# Altium PCB PPO.PcbDoc (part 1 of 2)
Units mil, origin at the board's own origin, x right, y up, seen from the top; angles counter-clockwise.
Board outline 2000 x 2000 mil, 4 copper layers (Top Layer, Int1, Int2, Bottom Layer), stack 53.912 mil thick; 86 components, 66 nets, 314 pads, 193 vias.
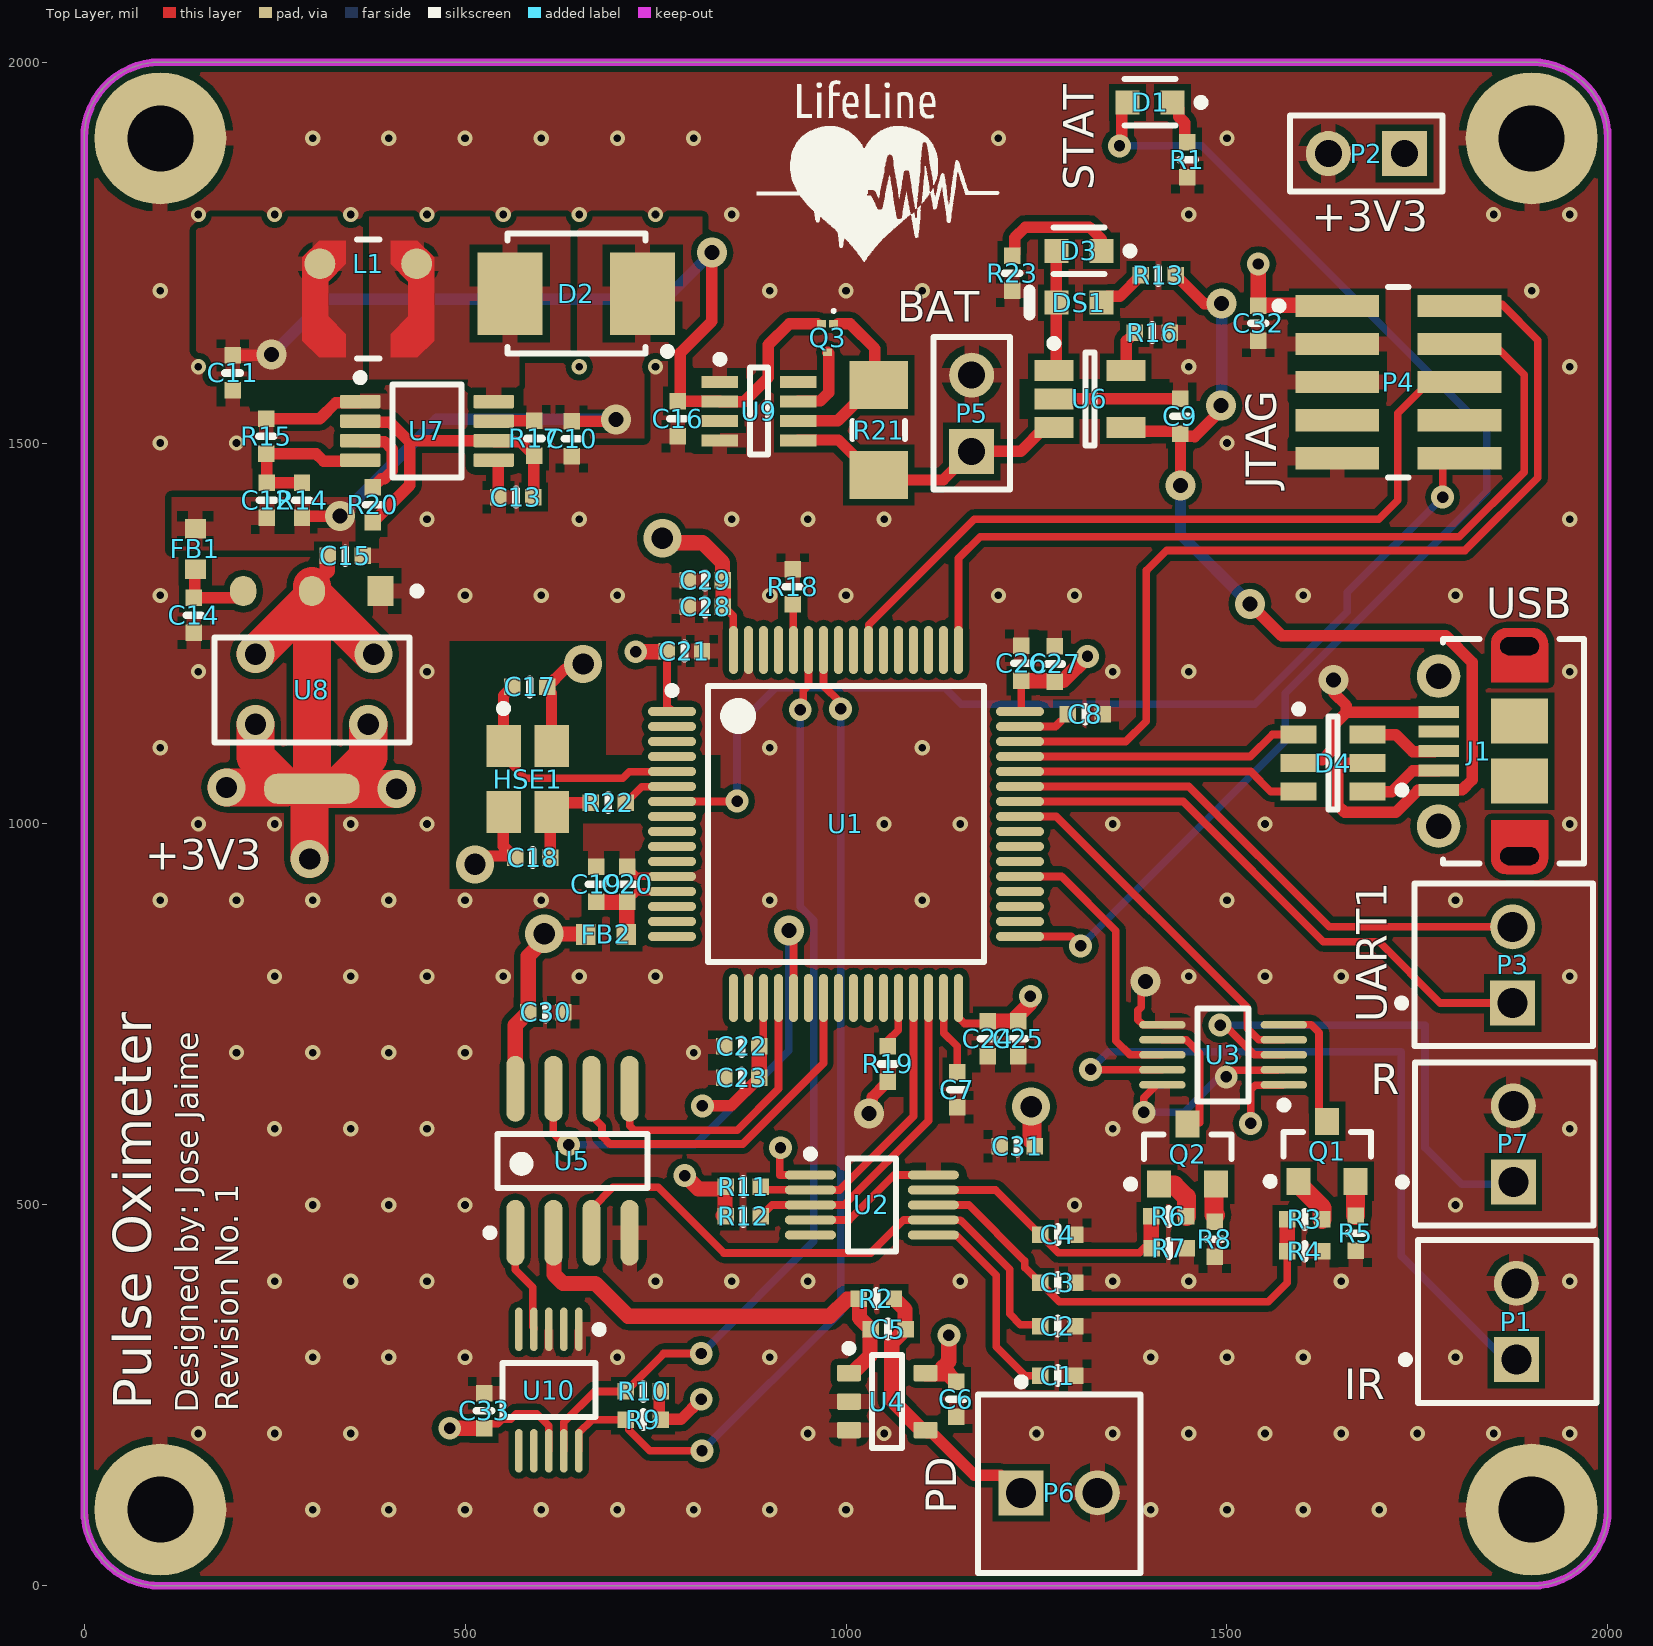
[diagram p0: Top Layer view]
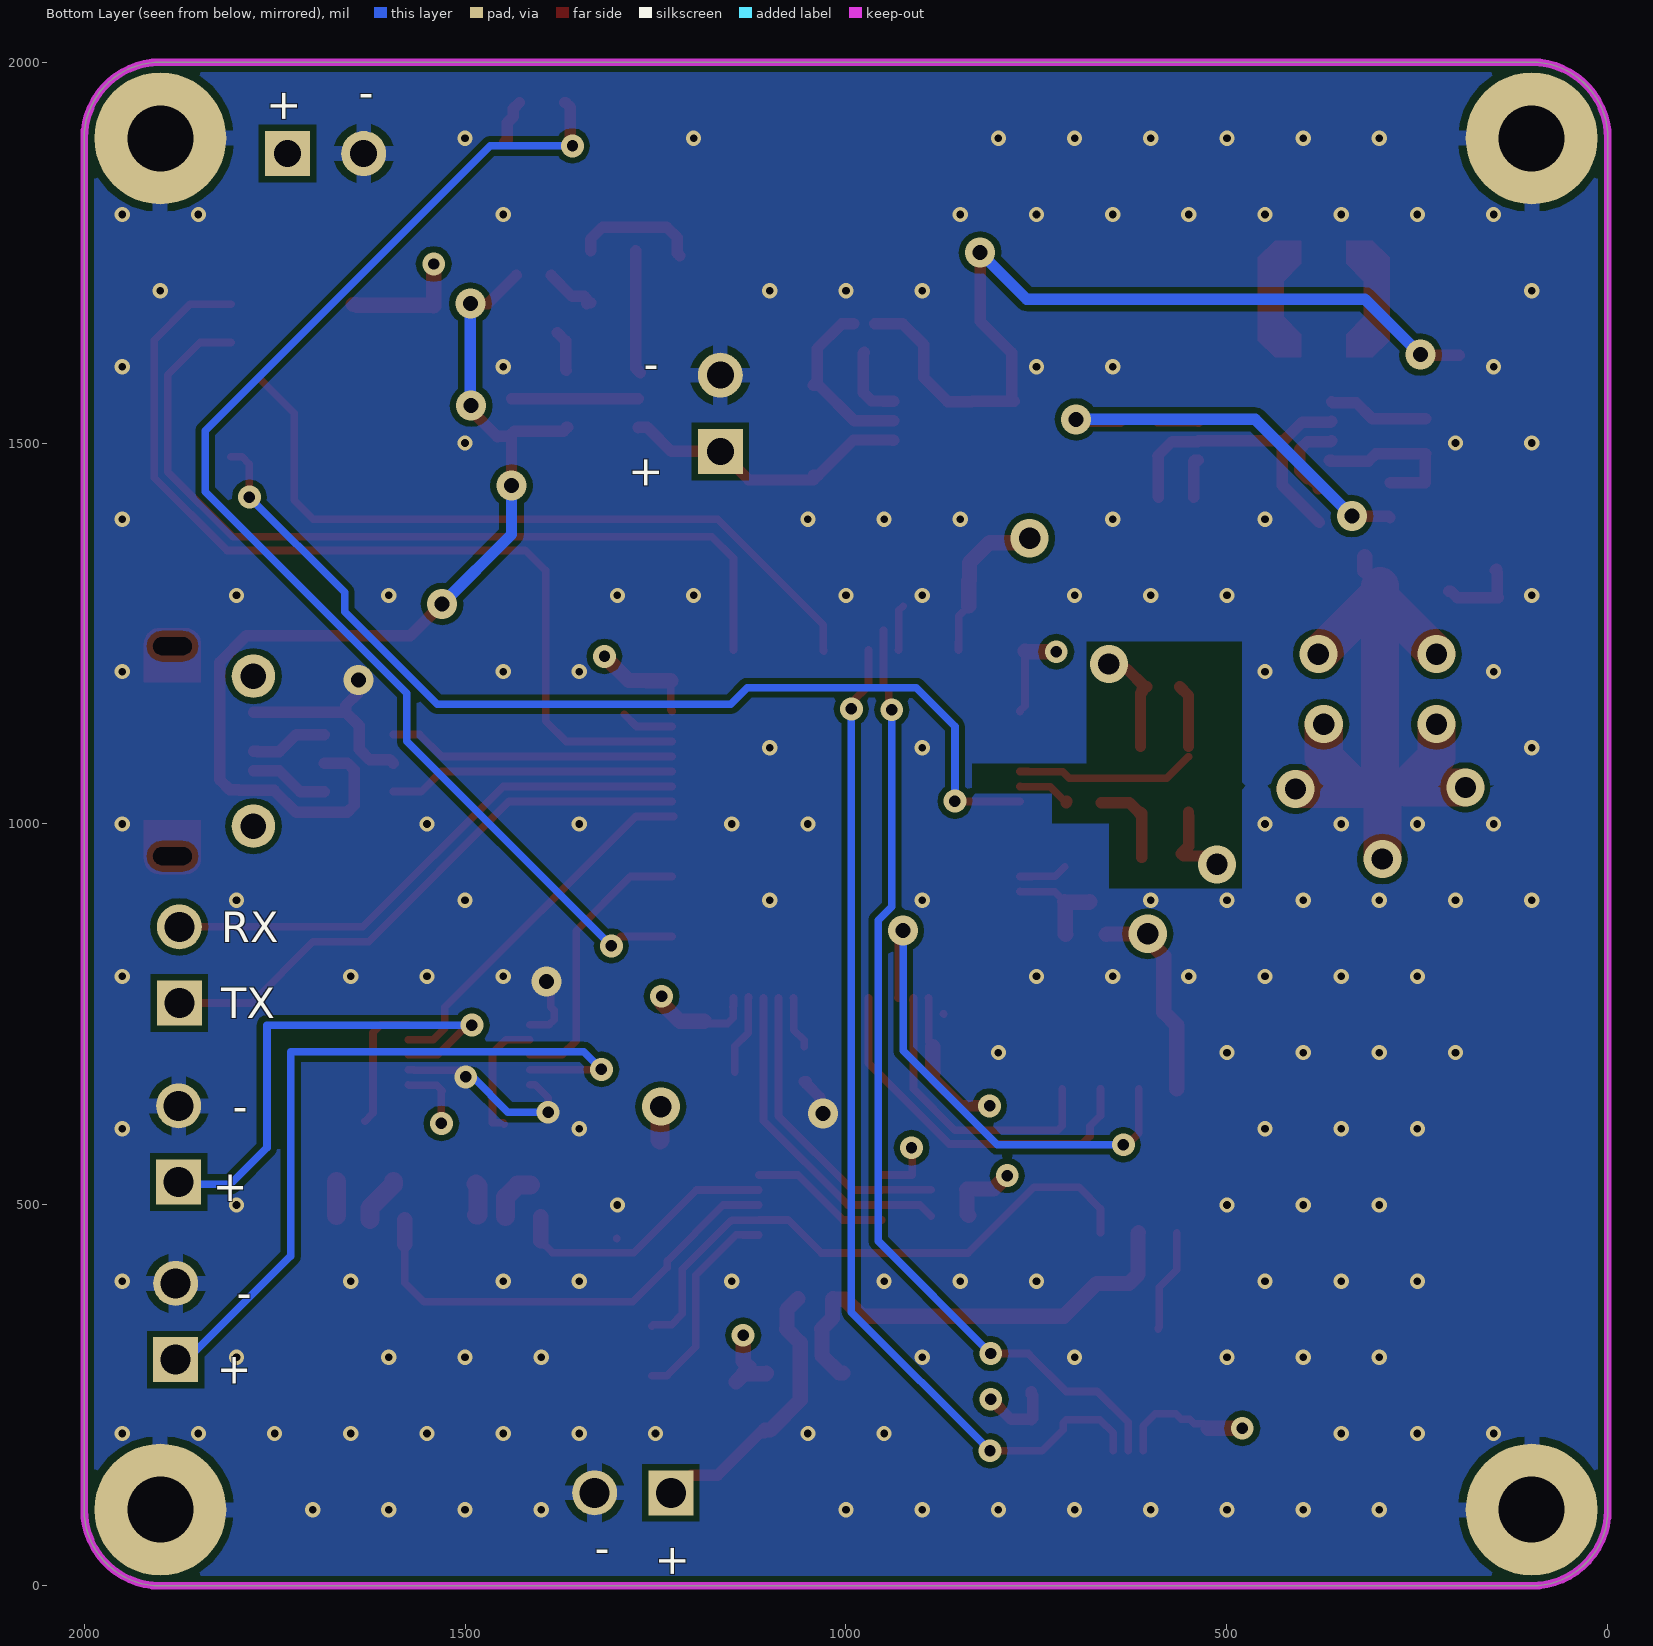
[diagram p1: Bottom Layer view, seen from below]
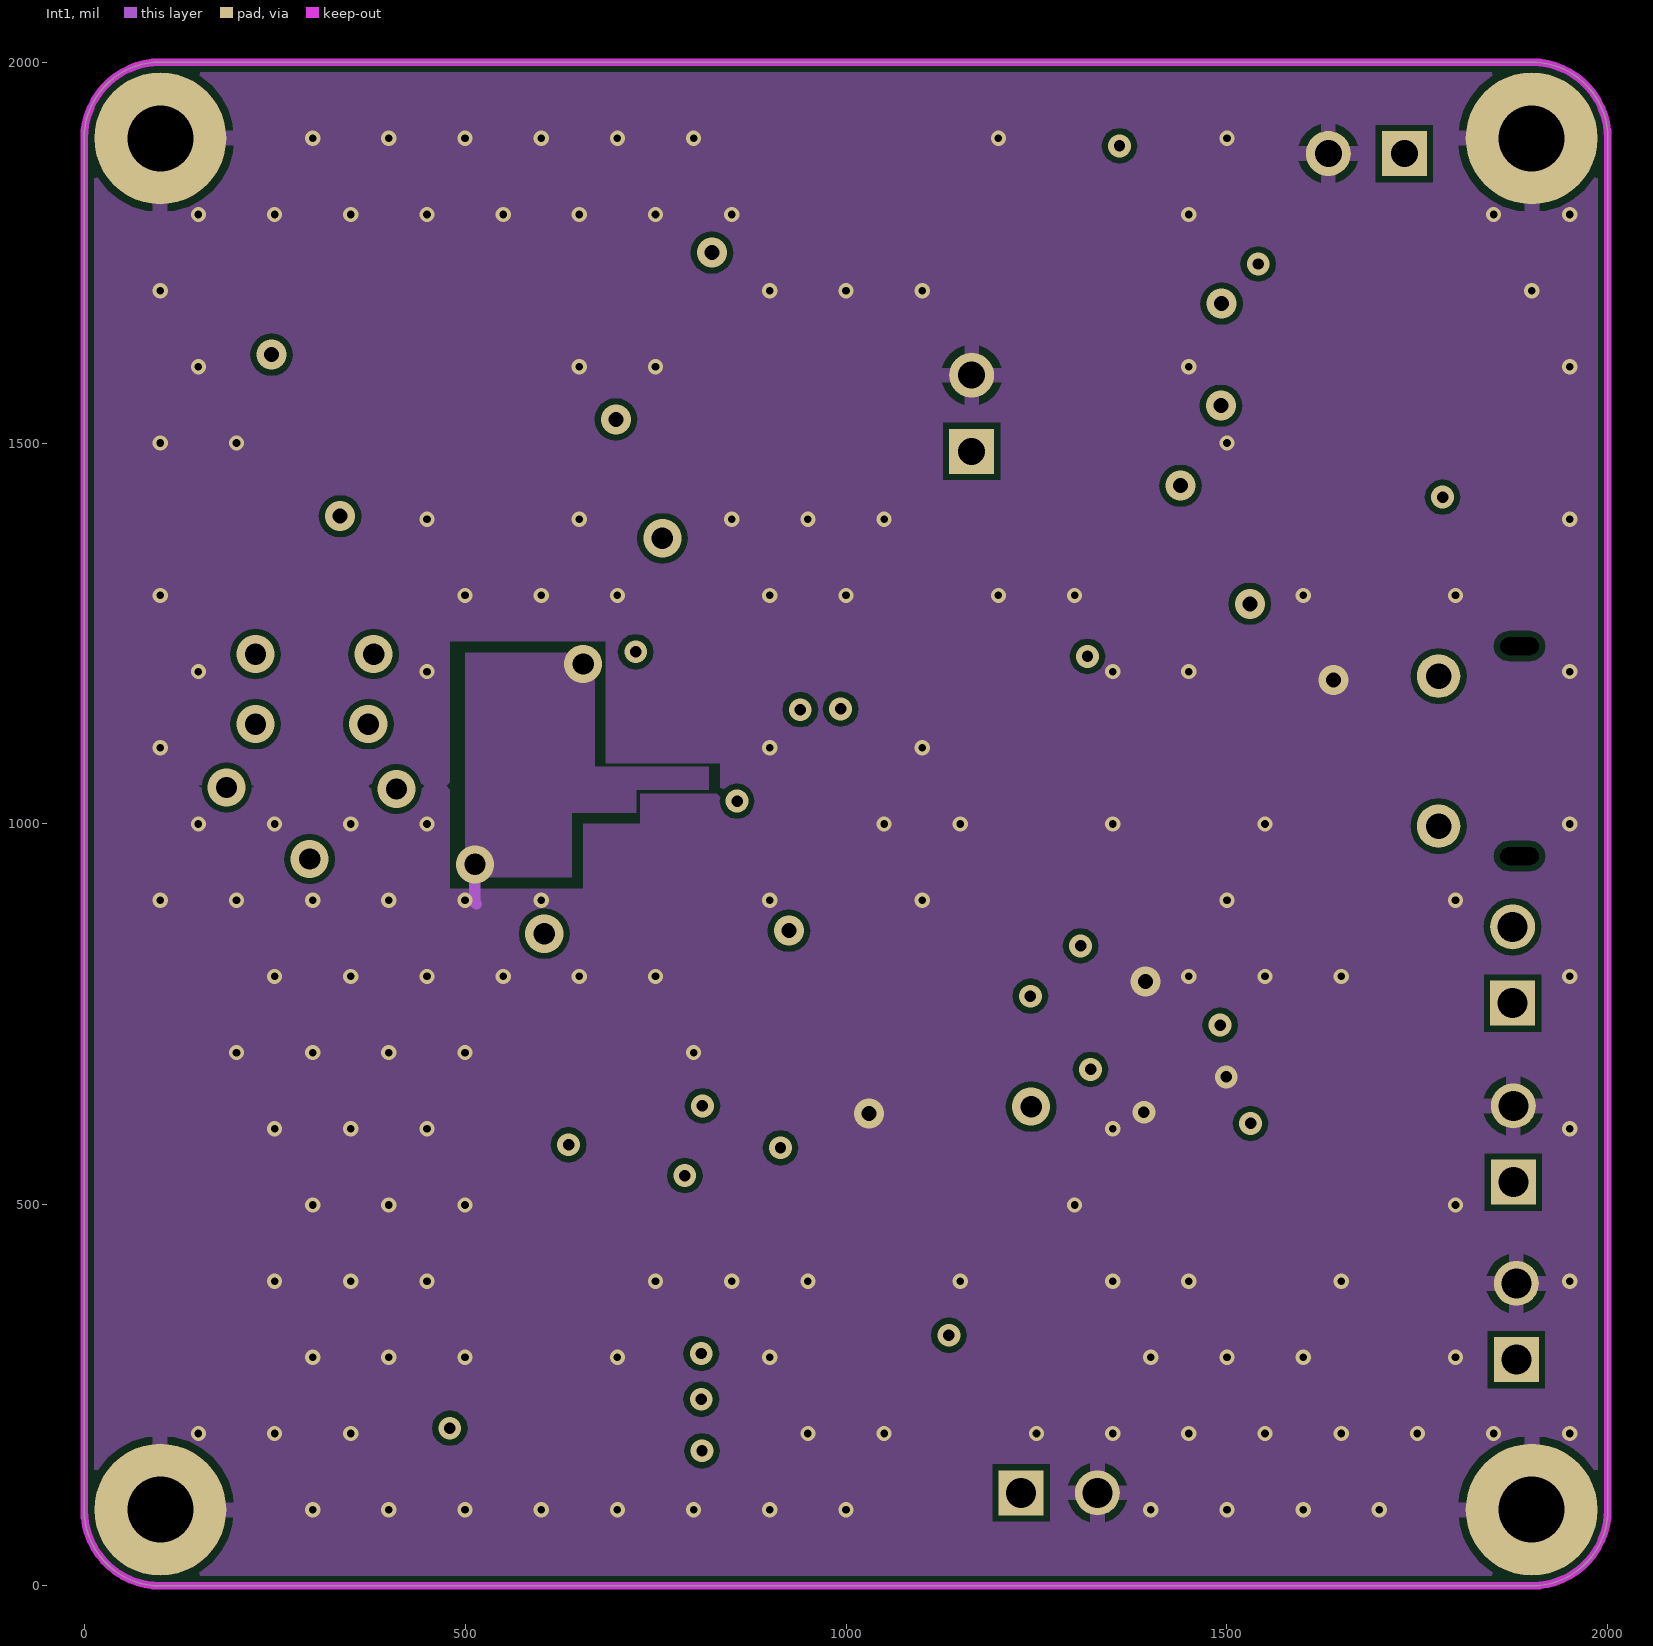
[diagram p2: Int1]
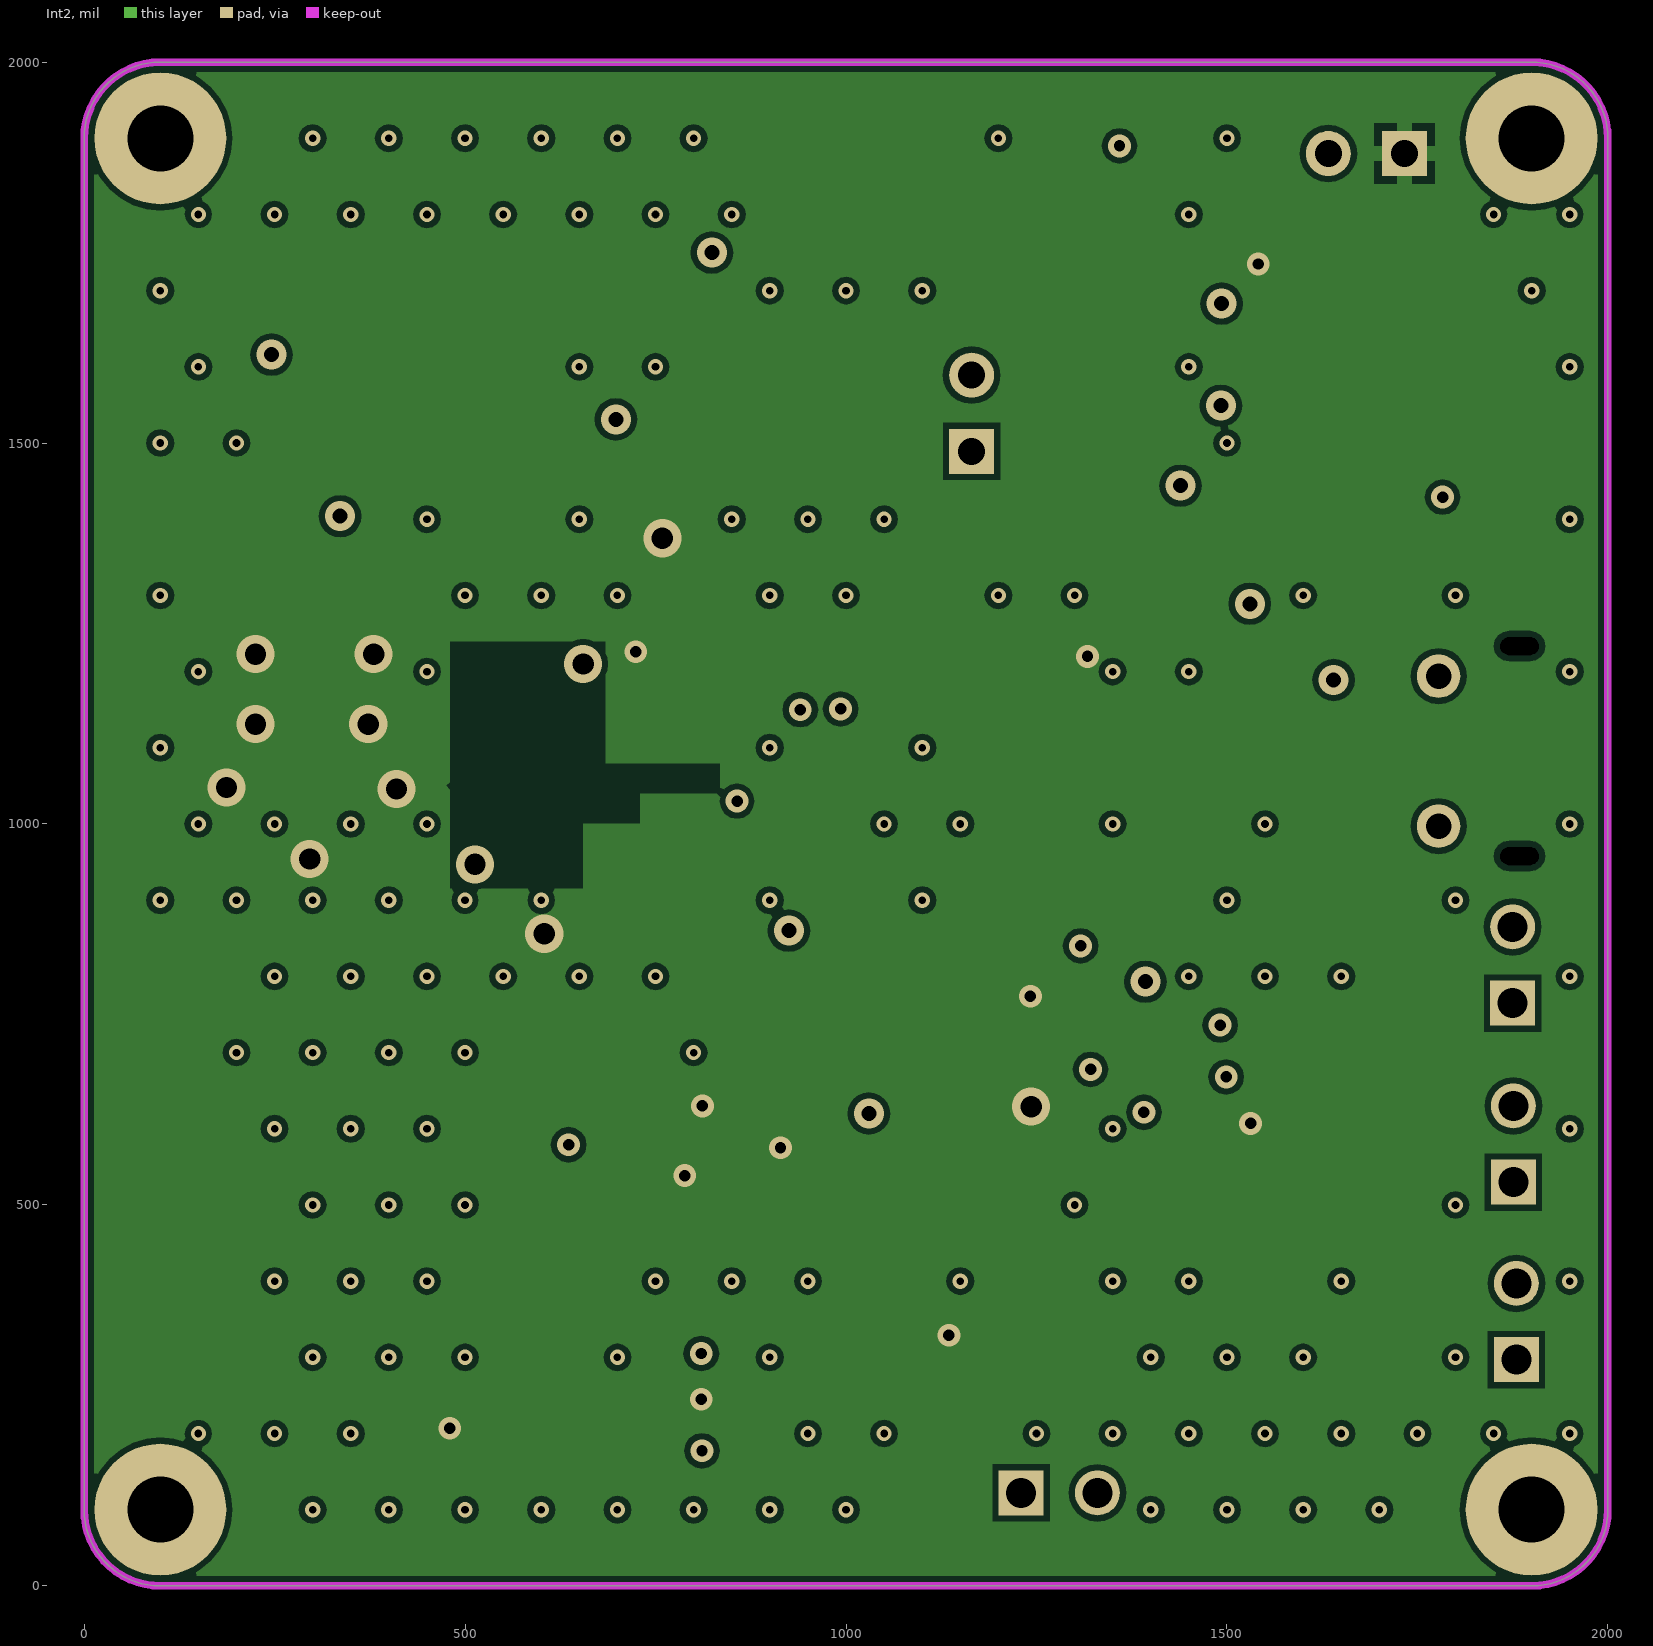
[diagram p3: Int2]
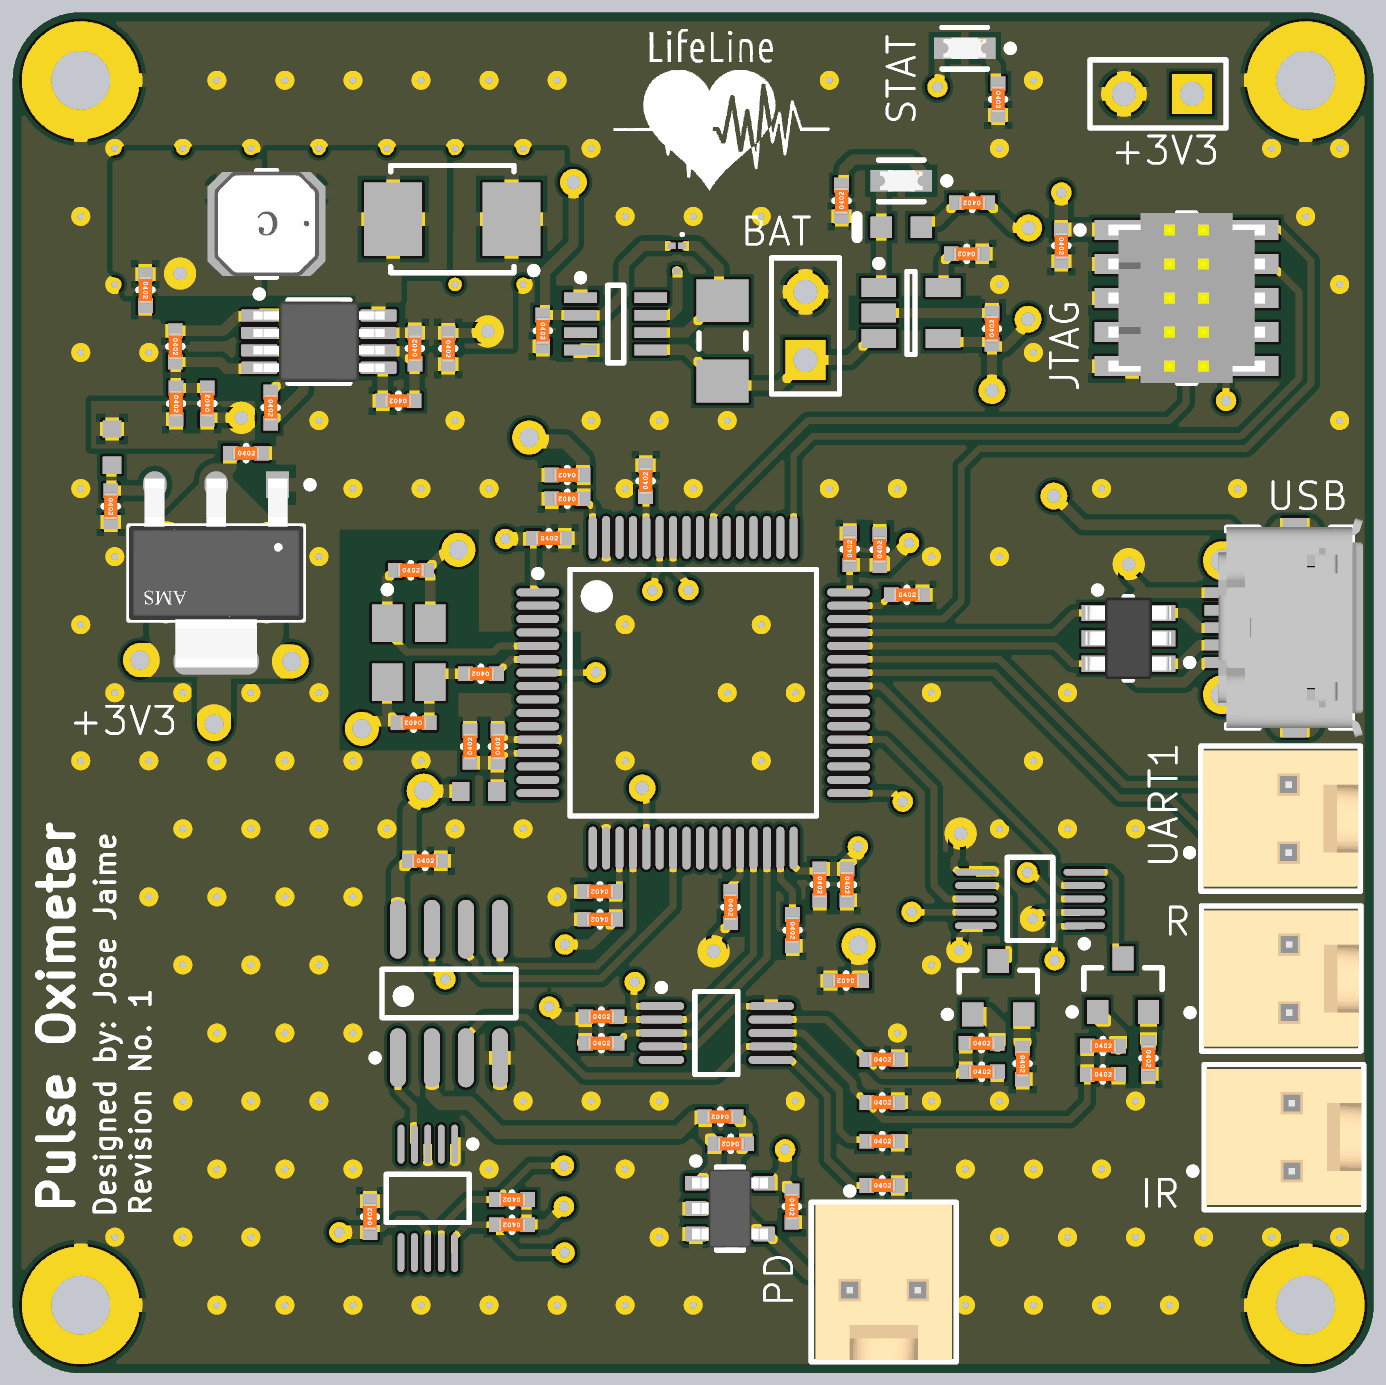
[diagram p4: 3D render of the assembled board from above, using the file's embedded part models]

## Layer stack, top to bottom
Top Solder: solder mask 1, SM-001, Dk 4
Top Layer: signal copper 1.378
Dielectric 1: prepreg 5.1, PP-017, Dk 4.3
Dielectric 2: prepreg 5.1, PP-017, Dk 4.3
Int1: signal copper 1.378
Dielectric 3: core 28, Core-039, Dk 4.8
Int2: signal copper 1.378
Dielectric 4: prepreg 5.1, PP-017, Dk 4.3
Dielectric 5: prepreg 5.1, PP-017, Dk 4.3
Bottom Layer: signal copper 1.378
Bottom Solder: solder mask 1, SM-001, Dk 4

## Board outline
0,100 0,1900 cw(c100,1900) 100,2000 1899.07,2000 cw(c1900,1900) 2000,1900 2000,100 cw(c1900,100) 1900,0 100,0 cw(c100,100)
cut-out: 2053,135

## Design rules (kind name [scope] priority, off if disabled: settings)
BoardOutlineClearance [All] p1: gap=7.87 ignorepadtopadclearanceinfootprint=FALSE except(15.75: Arc-SplitBarrior Arc-SplitContinuation Track-SplitBarrior Track-SplitContinuation SMDPad-SplitBarrior SMDPad-SplitContinuation THPad-SplitBarrior THPad-SplitContinuation Via-SplitBarrior Via-SplitContinuation Fill-SplitBarrior Fill-SplitContinuation Poly-SplitBarrior Poly-SplitContinuation Region-SplitBarrior Region-SplitContinuation Text-SplitBarrior Text-SplitContinuation)
Clearance "Stitching GND" [IsStitchingVia and InNet('GND') vs (IsVia and (Not IsStitchingVia)) Or IsPad] p1: gap=5 ignorepadtopadclearanceinfootprint=FALSE
Clearance "Clearance Bottom Layer" [OnLayer('Bottom Layer')] p2: gap=8 ignorepadtopadclearanceinfootprint=TRUE except(10: Arc-Text Track-Text SMDPad-Text THPad-Text Via-Text Fill-Text Poly-Text Region-Text Text-Text)
Clearance "Clearance Top Layer" [OnLayer('Top Layer')] p3: gap=8 ignorepadtopadclearanceinfootprint=TRUE except(10: Arc-Text Track-Text SMDPad-Text THPad-Text Via-Text Fill-Text Poly-Text Region-Text Text-Text)
Clearance [All] p4: gap=7.87 ignorepadtopadclearanceinfootprint=FALSE except(3.5: Arc-Arc Arc-Track Arc-SMDPad Track-Track Track-SMDPad SMDPad-SMDPad; 5: Arc-Via Track-Via SMDPad-Via THPad-Via Via-Via; 10: Arc-Text Track-Text SMDPad-Text THPad-Text Via-Text Fill-Text Poly-Text Region-Text Text-Text)
HoleSize [All] p1: absolutevalues=TRUE maxlimit=248.03 minlimit=7.87 maxpercent=80.000 minpercent=20.000
MinimumAnnularRing [All] p1: minimumring=3
MinimumSolderMaskSliver [All] p1: minsoldermaskwidth=3.94
PolygonConnect PolygonConnect_1 [All] p1: thpad.connectstyle=Relief thpad.reliefconductorwidth=20 thpad.reliefentries=4 thpad.polygonreliefangle="90 Angle" thpad.airgapwidth=10 smdpad.connectstyle=Relief smdpad.reliefconductorwidth=20 smdpad.reliefentries=4 smdpad.polygonreliefangle="90 Angle" smdpad.airgapwidth=10 via.connectstyle=Direct via.reliefconductorwidth=20 via.reliefentries=4 via.polygonreliefangle="90 Angle" via.airgapwidth=10
RoutingCorners [All] p1: cornerstyle=Round minsetback=100 maxsetback=100
RoutingVias [All] p1: holewidth=19.68 width=39.37 viastyle="Through Hole" minholewidth=7.87 minwidth=17.72 maxholewidth=39.37 maxwidth=78.74
SilkToSilkClearance [All] p1: silktosilkclearance=3.94
SilkToSolderMaskClearance [IsPad] p1: minsilkscreentomaskgap=3.94 clearancetoexposedcopper=TRUE
SolderMaskExpansion [All] p1: expansion=4
Width [All] p1: maxlimit=100 minlimit=3.5 preferedwidth=15
25 further rules are at their usual default settings.

## Components (designator, comment, footprint, x,y, rotation, side; value= is the part's Value field where it differs from the comment)
C1 "Cap" SMD-0402C 1277.83,276 r270 top value=1n
C2 "Cap" SMD-0402C 1277.83,341 r270 top value=1n
C3 "Cap" SMD-0402C 1277.83,398 r270 top value=1n
C4 "Cap" SMD-0402C 1277.83,461 r270 top value=1n
C5 "Cap" SMD-0402C 1055.17,337.17 r90 top value=150p
C6 "Cap" SMD-0402C 1145,245 r180 top value=100n
C7 "Cap" SMD-0402C 1146,651.17 r180 top value=2.2u
C8 "Cap" SMD-0402C 1314,1144 r270 top value=2.2u
C9 "Cap" SMD-0402C 1439,1535 r0 top value=10u
C10 "Cap" SMD-0402C 640,1505.8 r180 top value=68u
C11 "Cap" SMD-0402C 195,1592 r180 top value=22u
C12 "Cap" SMD-0402C 240,1425 r180 top value=39p
C13 "Cap" SMD-0402C 566.83,1429 r90 top value=100n
C14 "Cap" SMD-0402C 144,1274 r180 top value=10u
C15 "Cap" SMD-0402C 343,1352 r270 top value=10u
C16 "Cap" SMD-0402C 779,1532 r180 top value=10u
C17 "Cap" SMD-0402C 585,1180 r270 top value=10p
C18 "Cap" SMD-0402C 589,956 r90 top value=10p
C19 "Cap" SMD-0402C 672,921 r0 top value=100n
C20 "Cap" SMD-0402C 713,921 r0 top value=10n
C21 "Cap" SMD-0402C 788,1227 r270 top value=10u
C22 "Cap" SMD-0402C 863,708 r90 top value=100n
C23 "Cap" SMD-0402C 863,667 r90 top value=100n
C24 "Cap" SMD-0402C 1186,718 r180 top value=100n
C25 "Cap" SMD-0402C 1226,718 r180 top value=100n
C26 "Cap" SMD-0402C 1230,1211 r0 top value=100n
C27 "Cap" SMD-0402C 1274,1210 r0 top value=100n
C28 "Cap" SMD-0402C 815,1285 r90 top value=100n
C29 "Cap" SMD-0402C 815,1320 r90 top value=100n
C30 "Cap" SMD-0402C 606,753 r270 top value=100n
C31 "Cap" SMD-0402C 1224.69,577 r90 top value=10u
C32 "Cap" SMD-0402C 1541,1657 r180 top value=100n
C33 "Cap" SMD-0402C 525,230 r0 top value=100n
D1 "HSMG-C191" FP-HSMG-C191-MFG 1399,1947 r180 top
D2 "MBRS140T3G" ONSC-SMB-2-403A-03_H_V 646,1696 r180 top
D3 "HSMG-C191" FP-HSMG-C191-MFG 1305.72,1752.25 r180 top
D4 "USBLC6-2SC6" STM-SOT23-6L_V 1639.47,1080 r0 top
DS1 "HSMH-C190" AVAG-HSMX-C190_V 1305.72,1684.25 r180 top
FB1 "BLM18EG101TN1D" MURA-BLM18-RF-H3-CHIP-2_V 146,1361 r270 top
FB2 "BLM18EG101TN1D" MURA-BLM18-RF-H3-CHIP-2_V 685,855 r0 top
HSE1 "TSX-3225 16.0000MF18X-AC3" EPSON-TSX-3225_V 582,1059 r270 top
J1 "105017-0001" USB-MICRO-B_V 1830.85,1095.63 r90 top
L1 "LPS4018-223MRB" FP-LPS4018-MFG 373,1689 r180 top value=22uH
P1 "61900211121" 61900211121 1868,347 r270 top
P2 "Header 2" HDR1X2 1733,1880 r180 top
P3 "61900211121" 61900211121 1863.19,815 r270 top
P4 "FTSH-105-01-L-DV-K" SMTC-FTSH-105-01-L-DV-K_V 1725,1580 r270 top
P5 "Header 2" HDR1X2 1165,1489 r90 top
P6 "61900211121" 61900211121 1280,134 r180 top
P7 "61900211121" 61900211121 1864,580 r270 top
Q1 "MMBT2222ALT1G" ONSC-SOT-23-3-318-08_V 1631.6,570.37 r90 top
Q2 "MMBT2222ALT1G" ONSC-SOT-23-3-318-08_V 1448.35,566.65 r90 top
Q3 "TF256-3-TL-H" ONSC-USFP-3-524AC_V 976,1638 r270 top
R1 "Res1" SMD-0402C 1448,1872 r180 top value=2k2
R2 "Res1" SMD-0402C 1040,377 r90 top value=100k
R3 "Res1" SMD-0402C 1602,481 r270 top value=100
R4 "Res1" SMD-0402C 1602,439.17 r270 top value=5.1k
R5 "Res1" SMD-0402C 1669,463 r180 top value=10
R6 "Res1" SMD-0402C 1423.69,485 r270 top value=100
R7 "Res1" SMD-0402C 1424,443 r270 top value=5.1k
R8 "Res1" SMD-0402C 1484,455 r180 top value=10
R9 "Res1" SMD-0402C 733.69,218.17 r90 top value=2k2
R10 "Res1" SMD-0402C 733.69,255.17 r90 top value=2k2
R11 "Res1" SMD-0402C 865,524 r270 top value=2k2
R12 "Res1" SMD-0402C 865,485 r270 top value=2k2
R13 "Res1" SMD-0402C 1410,1720 r90 top value=470
R14 "Res1" SMD-0402C 286,1425 r0 top value=150k
R15 "Res1" SMD-0402C 239,1509 r180 top value=50k
R16 "Res1" SMD-0402C 1402,1645 r90 top value=2.2k
R17 "Res1" SMD-0402C 591,1506 r0 top value=500
R18 "Res1" SMD-0402C 930,1311.17 r0 top value=10k
R19 "Res1" SMD-0402C 1055,685 r180 top value=10k
R20 "Res1" SMD-0402C 379,1419 r180 top value=200k
R21 "WSL1206R0250FEA" RESC3216X89X51ML25T25 1043,1517 r90 top
R22 "Res1" SMD-0402C 688,1028 r90 top value=220
R23 "Res1" SMD-0402C 1218,1723 r0 top value=470
U1 "STM32F405RGT6TR" STM-LQFP64_L 1000,1000 r0 top
U2 "MCP4728-E/UN" MSOP-UN10_N 1034,500 r0 top
U3 "ADG884BRMZ" ADI-RM-10_L 1495,697 r180 top
U4 "OPA170AIDBVT" DBV0005A_L 1054,242 r0 top
U5 "MCP6S91T-E/SN" SOIC-SN8_N 641,558 r90 top
U6 "MCP73831T-2ACI/OT" SOT-23-OT5_M 1320,1558 r0 top
U7 "LM2621MM/NOPB" DGK0008A_N 450,1516 r0 top
U8 "AMS1117-3.3" FP-AMS1117-IPC_C 299,1176 r270 top
U9 "LTC4361CTS8-1#TRMPBF" LT-TS8-8-TSOT-23_V 886,1542 r0 top
U10 "ADS1113IDGST" TI-DGS10_L 610,257 r270 top

## Footprints (in the part's own frame and the unit in brackets; to place one, negate y for a bottom-side part, rotate by r counter-clockwise, add the part's x,y. Pads: shape width x height; smd on the part's side, far side on the other; paste and mask are expansions set on the pad)
61900211121 [mm] "2.54mm Male Locking Header, 2p"
  rect 1.5x1.5 hole 1: 1(1.27,0.3)
  round 1.5 hole 1: 2(-1.27,0.3)
  silkscreen extent -2.71,-3.52 2.71,2.98, body extent -2.54,-2.9 2.54,2.9, height 11.53
ADI-RM-10_L [mm] "SOP, 10-Leads, Body 3x3mm, Pitch 0.5mm, IPC High Density"
  oval 1.55x0.25 smd: 1(-2.025,1) 2(-2.025,0.5) 3(-2.025,0) 4(-2.025,-0.5) 5(-2.025,-1) 6(2.025,-1) 7(2.025,-0.5) 8(2.025,0) 9(2.025,0.5) 10(2.025,1)
  silkscreen extent -2.15,-1.55 0.85,1.8, body extent -1.55,-1.55 1.55,1.55, height 1.1
AVAG-HSMX-C190_V [mm] "SMD, 2-Leads, Body 1.6x0.8mm, Height 0.9mm"
  rect 0.8x0.8 smd: 1(-0.75,0) 2(0.75,0)
  silkscreen extent 1.65,-0.4 1.65,0.4, body extent -0.8,-0.4 0.8,0.4, height 0.9
DBV0005A_L [mm] "SOT23, 5-Leads, Body 3.05x1.75mm, Pitch 0.95mm, IPC High Density"
  rrect18% 0.8x0.55 smd: 1(-1.275,0.95) 2(-1.275,0) 3(-1.275,-0.95) 4(1.275,-0.95) 5(1.275,0.95)
  silkscreen extent -1.4,-1.55 0.5,1.9, body extent -1.42,-1.46 1.42,1.46, height 1.08
DGK0008A_N [mm] "TSOP, 8-Leads, Body 3.1x3.1mm, Pitch 0.65mm, IPC Medium Density"
  rrect22% 1.35x0.45 smd: 1(-2.225,0.975) 2(-2.225,0.325) 3(-2.225,-0.325) 4(-2.225,-0.975) 5(2.225,-0.975) 6(2.225,-0.325) 7(2.225,0.325) 8(2.225,0.975)
  silkscreen extent -2.35,-1.55 1.15,1.9, body extent -2.45,-1.5 2.45,1.5, height 0.94
EPSON-TSX-3225_V [mm] "SMD, 4-Leads, Body 3.2x2.5mm"
  rect 1.4x1.15 smd: 1(-1.1,-0.8) 2(1.1,-0.8) 3(1.1,0.8) 4(-1.1,0.8)
  silkscreen extent -2.47,-0.92 -2.23,-0.67, body extent -1.6,-1.25 1.6,1.25, height 0.6
FP-AMS1117-IPC_C [mm]
  rect 1.004x0.872 smd paste+0 mask+0: 1(-3.295,2.29)
  rrect100% 1.004x0.872 smd paste+0 mask+0: 2(-3.295,0) 3(-3.295,-2.29)
  rrect87% 1.004x3.182 smd paste+0 mask+0: 4(3.295,0)
  silkscreen extent -3.42,-3.25 1.75,3.63, body extent -3.9,-3.35 3.9,3.35, height 0.25
FP-HSMG-C191-MFG [mm]
  rect 0.8x0.8 smd paste+0 mask+0: 1(-0.75,0) 2(0.75,0)
  silkscreen extent -1.83,-0.77 0.85,0.77, body extent -1.25,-0.55 1.25,0.55, height 0.25
FP-LPS4018-MFG [mil]
  round 40.39 smd paste+0 mask+0: 1(-63.42,-46.25) 2(63.42,-46.25)
  Top Layer region: -29.53,76.57 -64.57,76.57 -86.61,54.92 -86.61,-54.92 -64.57,-76.57 -29.53,-76.57 -29.53,-46.06 -52.36,-22.64 -52.36,22.64 -29.53,46.06
  Top Layer region: 29.53,76.57 64.57,76.57 86.61,54.92 86.61,-54.92 64.57,-76.57 29.53,-76.57 29.53,-46.06 52.36,-22.64 52.36,22.64 29.53,46.06
  silkscreen extent -15,-78 15,78, body extent -91,-82 91,82, height 10
HDR1X2 [mm] "Connector; Header; 2 Position"
  rect 1.5x1.5 hole 0.9: 1(0,0)
  round 1.5 hole 0.9: 2(2.54,0)
  silkscreen extent -1.27,-1.27 3.81,1.27
LT-TS8-8-TSOT-23_V [mm] "SOT23, 8-Leads, Body 2.9x1.75mm, Pitch 0.65mm"
  rect 1.22x0.4 smd: 1(-1.31,0.975) 2(-1.31,0.325) 3(-1.31,-0.325) 4(-1.31,-0.975) 5(1.31,-0.975) 6(1.31,-0.325) 7(1.31,0.325) 8(1.31,0.975)
  silkscreen extent -1.43,-1.45 0.3,1.85, body extent -0.87,-1.45 0.88,1.45, height 1
MSOP-UN10_N [mm] "TSSOP, 10-Leads, Body 3x3mm, Pitch 0.5mm, IPC Medium Density"
  oval 1.7x0.3 smd: 1(-2.05,1) 2(-2.05,0.5) 3(-2.05,0) 4(-2.05,-0.5) 5(-2.05,-1) 6(2.05,-1) 7(2.05,-0.5) 8(2.05,0) 9(2.05,0.5) 10(2.05,1)
  silkscreen extent -2.17,-1.55 0.8,1.82, body extent -1.55,-1.55 1.55,1.55, height 1.1
MURA-BLM18-RF-H3-CHIP-2_V [mm] "Chip Ferrite Bead, 2-Leads, Body 1.6x0.8mm, Height 0.65mm, Reflow"
  rect 0.65x0.7 smd: 1(-0.675,0) 2(0.675,0)
  body extent -0.8,-0.4 0.8,0.4, height 0.65
ONSC-SMB-2-403A-03_H_V [mil] "Molded, 2-Leads, Body 4.6x3.95mm"
  rect 85x107.99 smd: 1(-87.01,0) 2(87.01,0)
  silkscreen extent -125,-79 91,81, body extent -91,-78 91,78, height 95
ONSC-SOT-23-3-318-08_V [mm] "SOT23, 3-Leads, Body 2.92x1.3mm, Pitch 0.95mm"
  rect 0.9x0.8 smd: 1(-1,0.95) 2(-1,-0.95) 3(1,0)
  silkscreen extent -1.12,-1.46 0.65,2.02, body extent -0.65,-1.46 0.65,1.46, height 1.11
ONSC-USFP-3-524AC_V [mm] "SOT223, 3-Leads, Body 0.8x0.6mm, Pitch 0.4mm"
  rect 0.25x0.3 smd: 1(-0.475,0.2) 2(-0.475,-0.2) 3(0.475,0)
  silkscreen extent -0.95,0.15 -0.85,0.25, body extent -0.4,-0.3 0.4,0.3, height 0.3
RESC3216X89X51ML25T25 [mm] "Chip Resistor, 2-Leads, Body 3.20x1.60mm, IPC Low Density"
  rect 1.6x1.95 smd: 1(-1.5,0) 2(1.5,0)
  silkscreen extent -0.3,-0.87 0.3,0.87, body extent -1.73,-0.92 1.73,0.92, height 0.89
SMD-0402C [mm]
  rect 0.55x0.55 smd: 1(0,0.584) 2(0,-0.584)
  silkscreen extent -0.25,0 0.25,0, body extent -0.25,-0.51 0.25,0.51, height 0.51
SMTC-FTSH-105-01-L-DV-K_V [mm] "CONN, 10-Leads, Body 6.35x3.43mm, Pitch 1.27mm"
  rect 0.74x2.79 smd: 1(-2.54,-2.035) 2(-2.54,2.035) 3(-1.27,-2.035) 4(-1.27,2.035) 5(0,-2.035) 6(0,2.035) 7(1.27,-2.035) 8(1.27,2.035) 9(2.54,-2.035) 10(2.54,2.035)
  silkscreen extent -3.17,-4.1 3.17,0.34, body extent -3.17,-2.92 3.18,2.92, height 6.12
SOIC-SN8_N [mm] "SOIC, 8-Leads, Body 4.9x3.9mm, Pitch 1.27mm, IPC Medium Density"
  oval 2.2x0.6 smd: 1(-2.4,1.905) 2(-2.4,0.635) 3(-2.4,-0.635) 4(-2.4,-1.905) 5(2.4,-1.905) 6(2.4,-0.635) 7(2.4,0.635) 8(2.4,1.905)
  silkscreen extent -2.52,-2.5 0.9,2.88, body extent -2,-2.5 2,2.5, height 1.75
SOT-23-OT5_M [mm] "SOT23, 5-Leads, Body 2.9x1.7mm, Pitch 0.95mm, Lead Span 2.8mm, IPC Low Density"
  rect 1.3x0.7 smd: 1(-1.2,0.95) 2(-1.2,0) 3(-1.2,-0.95) 4(1.2,-0.95) 5(1.2,0.95)
  silkscreen extent -1.32,-1.55 0.15,1.97, body extent -0.9,-1.55 0.9,1.55, height 1.45
STM-LQFP64_L [mm] "QFP, 64-Leads, Body 10x10mm, Pitch 0.5mm, IPC High Density"
  oval 1.6x0.3 smd: 1(-5.8,3.75) 2(-5.8,3.25) 3(-5.8,2.75) 4(-5.8,2.25) 5(-5.8,1.75) 6(-5.8,1.25) 7(-5.8,0.75) 8(-5.8,0.25) 9(-5.8,-0.25) 10(-5.8,-0.75) 11(-5.8,-1.25) 12(-5.8,-1.75) 13(-5.8,-2.25) 14(-5.8,-2.75) 15(-5.8,-3.25) 16(-5.8,-3.75) 33(5.8,-3.75) 34(5.8,-3.25) 35(5.8,-2.75) 36(5.8,-2.25) 37(5.8,-1.75) 38(5.8,-1.25) 39(5.8,-0.75) 40(5.8,-0.25) 41(5.8,0.25) 42(5.8,0.75) 43(5.8,1.25) 44(5.8,1.75) 45(5.8,2.25) 46(5.8,2.75) 47(5.8,3.25) 48(5.8,3.75)
  oval 0.3x1.6 smd: 17(-3.75,-5.8) 18(-3.25,-5.8) 19(-2.75,-5.8) 20(-2.25,-5.8) 21(-1.75,-5.8) 22(-1.25,-5.8) 23(-0.75,-5.8) 24(-0.25,-5.8) 25(0.25,-5.8) 26(0.75,-5.8) 27(1.25,-5.8) 28(1.75,-5.8) 29(2.25,-5.8) 30(2.75,-5.8) 31(3.25,-5.8) 32(3.75,-5.8) 49(3.75,5.8) 50(3.25,5.8) 51(2.75,5.8) 52(2.25,5.8) 53(1.75,5.8) 54(1.25,5.8) 55(0.75,5.8) 56(0.25,5.8) 57(-0.25,5.8) 58(-0.75,5.8) 59(-1.25,5.8) 60(-1.75,5.8) 61(-2.25,5.8) 62(-2.75,5.8) 63(-3.25,5.8) 64(-3.75,5.8)
  silkscreen extent -5.92,-4.6 4.6,4.6, body extent -5,-5 5,5, height 1.6
STM-SOT23-6L_V [mm] "SOT23, 6-Leads, Body 3.05x1.75mm, Pitch 0.95mm"
  rect 1.2x0.6 smd: 1(-1.15,0.95) 2(-1.15,0) 3(-1.15,-0.95) 4(1.15,-0.95) 5(1.15,0) 6(1.15,0.95)
  silkscreen extent -1.27,-1.55 0.15,1.92, body extent -1.6,-1.53 1.6,1.53, height 1.45
TI-DGS10_L [mm] "SOP, 10-Leads, Body 3x3mm, Pitch 0.5mm, IPC High Density"
  oval 1.45x0.25 smd: 1(-2.025,1) 2(-2.025,0.5) 3(-2.025,0) 4(-2.025,-0.5) 5(-2.025,-1) 6(2.025,-1) 7(2.025,-0.5) 8(2.025,0) 9(2.025,0.5) 10(2.025,1)
  silkscreen extent -2.15,-1.55 0.9,1.8, body extent -1.55,-1.55 1.55,1.55, height 1.1
USB-MICRO-B_V [mm] "USB, MICRO B, Body 7.491x4.695 mm, Pitch 0.65 mm"
  rect 0.4x1.35 smd: 1(-1.3,1.35) 2(-0.65,1.35) 3(0,1.35) 4(0.65,1.35) 5(1.3,1.35)
  round 1.45 hole 0.85: 6(-2.5,1.35) 7(2.5,1.35)
  rrect50% 0x0 hole 0.6 slot 1.3 at 90 deg: 8(-3.5,-1.35) 11(3.5,-1.35)
  rect 1.5x1.9 smd: 9(-1,-1.35) 10(1,-1.35)
  Top Layer circle w0.5: c-3.6,-1.8 r0.25
  Top Layer circle w0.5: c-3.6,-0.9 r0.25
  Top Layer circle w0.5: c3.6,-1.8 r0.25
  Top Layer circle w0.5: c3.6,-0.9 r0.25
  Top Layer region: -3.6,-1.8 -3.6,-0.9 -4.1,-0.9 -4.1,-1.8
  Top Layer region: 3.6,-0.9 3.6,-1.8 4.1,-1.8 4.1,-0.9
  Top Layer region: 2.3,-0.4 2.3,-2.3 3.6,-2.3 3.6,-0.4
  Top Layer region: -2.3,-2.3 -2.3,-0.4 -3.6,-0.4 -3.6,-2.3
  silkscreen extent -3.75,-3.5 3.75,2.7, body extent -4.1,-3.9 4.1,1.5, height 2.67

## Part data
C1 C2 C3 C4 C5 C6 C7 C8 C9 C10 C11 C12 C13 C14 C15 C16 C17 C18 C19 C20 C21 C22 C23 C24 C25 C26 C27 C28 C29 C30 C31 C32 C33: "Capacitor", LatestRevisionDate=17-Jul-2002, LatestRevisionNote="Re-released for DXP Platform.", PackageDescription="Radial Cap, Thru-Hole; 2 Leads; 0.3 in Pin Spacing", PackageReference=RAD-0.3, Published=8-Jun-2000, Publisher="Altium Limited"
D1 D3: library part CMP-18399-000001-1, "LED GREEN DIFFUSED CHIP SMD", Colour=Green, Forward Current=20mA, Forward Voltage=2.2V, Manufacturer=Broadcom, Max Junction Temp=+95°C, Package=0, Power Dissipation=52mW, Reverse Voltage=5V, Temperature="-40°C to +85°C", Temperature Range High=+85°C, Temperature Range Low=-40°C, Automotive=No, Category=Diode, ComponentLink2Description=Datasheet, ComponentLink2URL=https://docs.broadcom.com/docs/AV02-0551EN, Device Class L1=Optoelectronics, Device Class L2=LEDs, Device Class L3=unset, Digikey Description="LED GREEN DIFFUSED CHIP SMD", Footprint 0 Description="SM LED; 2 Flat Leads", Height=0.7mm, Ipc Land Pattern Name=DIOC16080X45, Lead Free=Yes, Led Orientation="Top View", Luminous Intensity=15mcd, Manufacturer Part Number=HSMG-C191, Mouser Description="LED Uni-Color Green 570nm 2-Pin Chip LED T/R", Octopart=https://octopart.com/hsmg-c191-broadcom-71131308, Peak Emmision Wavelength=570nm, RoHS=TRUE, Viewing Angle=170°, Wavelength=572nm
D2: library part CMP-1055-00347-1, "Schottky Power Rectifier, 2-Pin SMB, Pb-Free, Tape and Reel", Manufacturer="On Semiconductor", ComponentLink1Description="Manufacturer URL", ComponentLink1URL=http://www.onsemi.com/, ComponentLink2Description=Datasheet, ComponentLink2URL=http://www.onsemi.cn/pub_link/Collateral/MBRS140T3-D.PDF, ComponentLink3Description="Package Specification", ComponentLink3URL=http://www.onsemi.com/pub_link/Collateral/1SMB5913BT3-D.PDF, Configuration=Single, DatasheetVersion="Rev. 9", IFSM Max (A)=40, Mounting Technology="Surface Mount", PackageDescription="2-Pin Small Molded Package, J-Bend Lead, Body 4.33 x 3.625 mm", PackageReference=SMB-2-403A-03_H, PackageVersion="Rev. H, 05/2011", Packing="Tape and Reel", PartNumber=MBRS140T3G, RoHS=TRUE
D4: library part CMP-2000-05378-1, "Very low capacitance ESD protection, 3.5 pF, -40 to 125 degC, 6-Pin SOT23, RoHS, Tape and Reel", Capacitance Value=3.5pF, Clamping Voltage=17V, Leakage Current=0.15uA, Manufacturer=STMicroelectronics, Operating Temperature Classification=Automotive, Operating Temperature Max Deg. C=125C, Operating Temperature Min Deg. C=-40C, Operating Temp Range=-40Cto125C, Package / Case=SOT-23, Package Description="6-Pin Small Outline Transistor, Body 2.925 x 1.625 mm, Pitch 0.95 mm", Package Reference=SOT23-6L, Peak Pulse Current=5A, Reverse Breakdown Voltage=6V, Reverse Stand-off Voltage=5V, Test Current (It)=1mA, Clamping Voltage (Max)=17V, Configuration=Dual, Datasheet URL=http://www.st.com/st-web-ui/static/active/en/resource/technical/document/datasheet/CD00050750.pdf, Datasheet Version="Rev. 5, 10/2011", Direction Type=Uni-Directional, Leakage Current (Max)=0.15uA, Manufacturer URL=http://www.st.com/, Mounting=SurfaceMount, Mounting Style=SurfaceMount, Number of Elements=1, Packaging=TapeandReel, Pin Count=6, Polarity=Uni-Directional, Product Depth (mm)=1.75mm, Product Height (mm)=1.3mm, Product Length (mm)=3.05mm, Rad Hardened=No, Suppressor Type=DiodeArrays, Working Voltage=5V, Working Voltage (Max)=5V
DS1: library part CMP-1744-00004-1, "LED Uni-Color Red, 65 mW, 20 mA, -40 to 85 degC, 2-Pin SMD, RoHS, Tape and Reel", Current Rating="1 A", Max Operating Temperature="85 degC", Min Operating Temperature="-30 degC", Package Quantity=2000, ComponentLink1Description="Manufacturer URL", ComponentLink1URL=http://www.avagotech.com/, ComponentLink2Description=Datasheet, ComponentLink2URL=http://docs.avagotech.com/docs/AV02-0551EN, ComponentLink3Description="Package Specification", ComponentLink3URL=http://www.fairchildsemi.com/dwg/MA/MA03D.pdf, Connector Type=USB, Contact Material=Copper, Contact Plating=Gold, DatasheetVersion=Mar-12, Gender=Male, Height="2.8 mm", Lead Pitch="0.65 mm", Length="7.5 mm", Mount="Surface Mount", PackageDescription="2-Pin Surface Mount Device, Body 1.6 x 0.8 mm, Height 0.9 mm", PackageReference=HSMX-C190, Packaging="Tape and Reel", Pins=5, REACH SVHC="No SVHC", RoHSCompliant=true, Width="5.6 mm"
FB1 FB2: library part CMP-0686-00530-2, "Chip Ferrite Bead for GHz Band General Use (Low DC Resistance Type), 100 Ohm, 2000 mA, -55 to 125 degC, 1.6 x 0.8 x 0.65 mm SMD, Tape and Reel", DC Resistance="0.045 Ohm Max.", Manufacturer=Murata, Operating Temperature Range="-55 to 125 degC", Rated Current="2000 mA", ComponentLink1Description="Manufacturer URL", ComponentLink1URL=http://www.murata.com/, ComponentLink2Description=Datasheet, ComponentLink2URL=http://www.murata.com/products/catalog/pdf/c31e.pdf, ComponentLink3Description="Package Specification", ComponentLink3URL=http://www.murata.com/products/catalog/pdf/c31e.pdf, DatasheetVersion=08/2013, Impedance (at 100 MHz)="100 Ohm +/- 25%", Mounting Technology="Surface Mount", PackageDescription="2-Pin Chip, Body 1.6 x 0.8 mm", PackageReference=BLM18_H650-2, Packing="Tape and Reel", PartNumber=BLM18EG101TN1D
HSE1: library part CMP-2000-07332-1, "MHz Range Crystal Unit, 16 MHz, -40 to 85 degC, 4-Pin SMD, RoHS, Tape and Reel", Frequency=16MHz, Frequency Stability=10PPM, Load Capacitance=9pF, Manufacturer=Epson, Operating Temperature Range=-40Cto+85C, Package / Case=3.2mmx2.5mm, Package Description="4-Pin Surface Mount Device, Body 3.2 x 2.5 mm", Package Reference=TSX-3225, =Q33519E40003212, Brand=EpsonTiming, Datasheet URL=https://support.epson.biz/td/api/doc_check.php?dl=brief_FA-238V_en.pdf, Datasheet Version=12/2015, Drive Level=200uW, ESR=60Ohms, Factory Pack Quantity=250, Height=0.6mm, Length=3.2mm, Manufacturer URL=https://www.eea.epson.com/, Mounting Style=SMD/SMT, Mounting Technology=SurfaceMount, Packaging=Reel, Product Category=Crystals, RoHS=True, Series=TSX-3225, Termination Style=SMD/SMT, Tolerance=10PPM, Type=Crystal, Unit Weight=0.000564oz, Width=2.5mm
J1: library part CMP-2000-05827-1, "Micro-USB B Receptacle, Right Angle, Bottom Mount, Surface Mount, with Solder Tabs, -30 to 85 degC, 5-Pin USB, RoHS, Tape and Reel", Manufacturer=Molex, Package Description="5-Leads USB, Micro B, Body 7.5 x 5 mm, Pitch 0.65 mm", Package Reference=MICRO-B, Package Version="Rev. F, 12/2012", Standard Package=1, Voltage - Max=30V, 3D Model=105017-0001.stp, Catalog Drawings=1050170001, Category=Connectors,Interconnects, Circuits=5, Connector Type=USB-microB, Datasheet URL=http://www.molex.com/elqNow/elqRedir.htm?ref=http://www.molex.com/webdocs/datasheets/pdf/en-us/1050170001_IO_CONNECTORS.pdf, Datasheet Version=03/2016, Family=USB,DVI,HDMIConnectors, Featured Product=Micro-USBConnectorsUSBConnectors, Features=Shielded,SolderRetention, Gender=Receptacle, Ingress Protection=-, Manufacturer URL=http://www.molex.com/, Mating Products=WM17145-ND-CABLEMICROUSBBTOSTDA1.0MWM17147-ND-CABLEMICROUSBBTOSTDA2.0MWM17146-ND-CABLEMICROUSBBTOSTDA1.5M, Mounting Technology=SurfaceMount, Mounting Type=BoardCutout,SurfaceMount,RightAngle, Number of Contacts=5, Online Catalog=Molex-MicroUSB, Other Names=WM1399DKR, Package URL=http://www.molex.com/pdm_docs/sd/1050170001_sd.pdf, Packaging=Digi-Reel®, PCN Assembly/Origin=ResinSupplier21/Oct/2015, RoHS Information=1050170001CertofCompliance, Series=-, Specifications=-
L1: library part CMP-11268-000004-1, "Power inductor, shielded, 20/30% tol, SMT, RoHS, lead-free, halogen-free", Ambient Temperature Range High=+85°C, Ambient Temperature Range Low=-40°C, Inductance=22uH, Manufacturer=Coilcraft, Package=LPS4018, Rms Current=0.9A, Saturation Current=0.8A, Self Resonant Frequency=26MHz, Series Resistance=0.36O, Test Frequency=1MHz, Tolerance=20%, Automotive=Yes, Automotive Grade="Grade 3", Category=Ind, ComponentLink2Description=Datasheet, ComponentLink2URL=https://www.coilcraft.com/pdfs/lps4018.pdf, Core Material=Ferrite, Device Class L1="Passive Components", Device Class L2=Inductors, Device Class L3="Fixed Inductors", Height=1.8mm, Lead Free=Yes, Manufacturer Part Number=LPS4018-223MRB, Mouser Description="Power inductor, shielded, 20/30% tol, SMT, RoHS, lead-free, halogen-free", Octopart=https://octopart.com/lps4018-223mrb-coilcraft-30061092, RoHS=TRUE, Shielding=true
P1 P3 P6 P7: library part CMP-1502-00584-1, "Male Locking Header WR-WTB, THT, Vertical, pitch 2.54 mm, 1 x 2 position", Contact Resistance=20mOhm, Manufacturer="Wurth Elektronik", Operating Temperature=-40to105degC, Working Voltage=250VAC, Datasheet URL=https://katalog.we-online.de/em/datasheet/6190xx11121.pdf, Gender=Male, Manufacturer URL=http://www.we-online.de, Mounting Technology=THT, Orientation=Vertical, Package Reference=61900211121, Packaging=Bag, Part Number=61900211121, Pitch=2.54mm, Position=1x2, Publisher=WurthElektronik
P2 P5: "Header, 2-Pin", LatestRevisionDate=17-Jul-2002, LatestRevisionNote="Re-released for DXP Platform.", Publisher="Altium Limited"
P4: library part CMP-2000-05353-1, "Male Header, Pitch 1.27 mm, 2 x 5 Position, Height 6.25 mm", Color=Black, Manufacturer=Samtec, Package Description="Male Header, Pitch 1.27 mm, 2 x 5 Position, Height 5.97 mm, Tail Length 4.32 mm", Standard Package=1, Category=Connectors,Interconnects, Connector Type=Header,Unshrouded, Contact Finish=Gold, Contact Finish Thickness=10µin(0.25µm), Contact Mating Length="0.120\"(3.05mm)", Contact Type=MalePin, Datasheet URL=http://suddendocs.samtec.com/prints/ftsh-1xx-xx-xxx-dv-xxx-mkt.pdf, Datasheet Version="Rev. ET, 10/1995", Family=RectangularConnectors-Headers,MalePins, Manufacturer URL=http://www.samtec.com/, Mating Products="SFMC-105-L2-S-D-TR-ND / -CONN.05\"SURFACE10POSSMT / FLE-105-01-G-DV-TR-ND / -CONNSKT1.27MM10POSDUALSMD / FLE-105-01-G-DV-A-P-ND / -CONNSKT1.27MM10POSDUALSMD / FLE-105-01-G-DV-A-ND / -CONNSKT1.27MM10POSDUALSMD / CLP-105-02-G-D-P-TR-ND / -CONNRCPT10POSDUAL.05\"SMD / SAM1155-05-ND / -CONNRCPT10POSDUAL.05\"SMD / SAM1154-05-ND / -CONNRCPT10POSDUAL.05\"SMD / SAM1153-05-ND / -CONNRCPT10POSDUAL.05\"SMD / SAM1226-05-ND / -CONNRCPT.05\"10POSDUALSMD", Mounting Type=SurfaceMount, Number of Positions=10, Number of Positions Loaded=All, Number Of Rows=2, Other Names=Q3937619, Package Reference=FTSH-105-01-L-DV-K, Package URL=http://suddendocs.samtec.com/prints/ftsh-1xx-xx-xxx-dv-xxx-footprint.pdf, Packaging=Tube, Pitch="0.050\"(1.27mm)", Product Training Modules=Board-to-BoardConnectors, Row Spacing="0.050\"(1.27mm)", Series=FTSH, Termination=Solder
Q1 Q2: library part CMP-1048-00538-1, "General Purpose Transistor, NPN Silicon, 3-Pin SOT-23, Pb-Free, Tape and Reel", Manufacturer="On Semiconductor", ComponentLink1Description="Manufacturer URL", ComponentLink1URL=http://www.onsemi.com/, ComponentLink2Description=Datasheet, ComponentLink2URL=http://www.onsemi.cn/pub_link/Collateral/MMBT2222LT1-D.PDF, ComponentLink3Description="Package Specification", ComponentLink3URL=http://www.onsemi.cn/pub_link/Collateral/318-08.PDF, DatasheetVersion="Rev. 10", fT Min (MHz)=300, IC Continuous (A)=0.6, Mounting Technology="Surface Mount", PackageDescription="3-Pin Small Outline Transistor, Body 2.92 x 1.3 mm, Pitch 0.95 mm", PackageReference=SOT-23-3-318-08, PackageVersion="Rev. AP, 11/2009", Packing="Tape and Reel", PartNumber=MMBT2222ALT1G, Polarity=NPN, RoHS=TRUE
Q3: library part CMP-1062-00084-1, "N-Channel JFET, 20 V, 100 to 180 uA, 1.7 mS, 3-Pin USFP, Pb-Free, Tape and Reel", Manufacturer="On Semiconductor", Channel Polarity="N Channel", ComponentLink1Description="Manufacturer URL", ComponentLink1URL=http://www.onsemi.com/, ComponentLink2Description=Datasheet, ComponentLink2URL=http://www.onsemi.com/pub_link/Collateral/ENA1616-D.PDF, ComponentLink3Description="Package Specification", ComponentLink3URL=http://www.onsemi.com/pub_link/Collateral/524AC.PDF, IDSS Max (uA)=180, IDSS Min (uA)=100, Mounting Technology="Surface Mount", PackageDescription="3-Pin Small Outline Transistor, Body 0.8 x 0.6 mm, Pitch 0.175 mm", PackageReference=USFP-3-524AC, PackageVersion="Rev. O, 02/2012", Packing="Tape and Reel", PartNumber=TF256-3-TL-H, RoHS=Pb-Free
R1 R2 R3 R4 R5 R6 R7 R8 R9 R10 R11 R12 R13 R14 R15 R16 R17 R18 R19 R20 R22 R23: "Resistor", LatestRevisionDate=17-Jul-2002, LatestRevisionNote="Re-released for DXP Platform.", PackageDescription="Axial Device, Thru-Hole; 2 Leads; 0.3 in Pin Spacing", PackageReference=AXIAL-0.3, Published=8-Jun-2000, Publisher="Altium Limited"
R21: library part CMP-2003-04354-1, Manufacturer="Vishay Dale", Part Number=WSL1206R0250FEA
U1: library part CMP-0243-00156-1, "ARM Cortex-M4 32-bit MCU+FPU, 1024 KB Flash, 192 KB Internal RAM, 51 I/Os, 64-Pin LQFP, -40 to 85 degC, Tape and Reel", I/Os (High Current)=51, Operating Frequency(F) (Processor speed) (MHz)=168, Package Description=LQFP64, Package Reference="64-Pin Low-profile Quad Flat Package, Body 10 x 10 mm, Pitch 0.5 mm", Supply Voltage(Vcc) min (V)=1.8, ComponentLink1Description="Manufacturer URL", ComponentLink1URL=http://www.st.com/, ComponentLink2Description=Datasheet, ComponentLink2URL=http://www.st.com/st-web-ui/static/active/en/resource/technical/document/datasheet/DM00037051.pdf, Core="ARM Cortex-M4", D/A Converter=2, DatasheetVersion="Rev. 6", FLASH Size (Prog) (kB)=1024, Internal RAM Size (kB)=192, Mounting Technology="Surface Mount", Packing="Tape and Reel"
U2: library part CMP-0188-01008-2, "12-Bit Quad Digital-to-Analog Converter with EEPROM Memory, 10-pin MSOP, Extended Temperature", ComponentLink1Description="Manufacturer URL", ComponentLink1URL=http://www.microchip.com/, ComponentLink2Description=Datasheet, ComponentLink2URL=http://ww1.microchip.com/downloads/en/DeviceDoc/22187E.pdf, ComponentLink3Description="Package Specification", ComponentLink3URL=http://www.microchip.com/stellent/groups/techpub_sg/documents/packagingspec/en012702.pdf, DatasheetVersion="revE, Oct-2010", PackageDescription="10-Lead Plastic Micro Small Outline Package (UN) [MSOP]", PackageReference=MSOP-UN10, PackageVersion="revBB, Aug-2009", RevisionNote="URLs added. DatasheetVersion updated."
U3: library part CMP-0790-00116-1, "0.5 Ohm CMOS, Dual 2:1 MUX / SPDT Audio Switches, -40 to 85 degC, 10-pin SOP (RM-10), Tube", Manufacturer="Analog Devices", Power Dissipation=5.5uW, # Sw Functions=2, Code_JEDEC=MO-187-BA, ComponentLink1Description="Manufacturer URL", ComponentLink1URL=http://www.analog.com/en/index.html, ComponentLink2Description=Datasheet, ComponentLink2URL=http://www.analog.com/static/imported-files/data_sheets/ADG884.pdf, ComponentLink3Description="Package Specification", ComponentLink3URL=http://www.analog.com/static/imported-files/packages/PKG_PDF/MSOP%28RM%29/RM_10.pdf, Configuration=SPDT, DatasheetVersion="Rev. D", Id, Is (ON)="200pA, 200pA, 200pA", Is OFF="200pA, 200pA, 200pA", Max Pos Supply=5.5V, Min Pos Supply=1.8V, Mounting Technology="Surface Mount", PackageDescription="10-Pin Mini Small Outline Package, Body 3 x 3 mm, Pitch 0.5 mm", PackageReference=RM-10, PackageVersion=Aug-05, Packing=Tube, PartNumber=ADG884BRMZ, Ron (ohms)=0.5
U4: library part CMP-0272-00932-3, "MicroPower, Rail-to-Rail Output, General Purpose Operational Amplifier, 2.7 to 36 V, -40 to 125 degC, 5-pin SOT23 (DBV5), Green (RoHS & no Sb/Br)", Manufacturer="Texas Instruments", Rating=Catalog, Total Supply Voltage(Max)(+5V is 5, +/-5V is 10)=36, Total Supply Voltage(Min)(+5V is 5, +/-5V is 10)=2.7, CMRR(Min)(dB)=104, Code_JEDEC=MO-178, ComponentLink1Description="Manufacturer URL", ComponentLink1URL=http://www.ti.com/, ComponentLink2Description=Datasheet, ComponentLink2URL=http://www.ti.com/lit/ds/symlink/opa170.pdf, ComponentLink3Description="Package Specification", ComponentLink3URL=http://www.ti.com/litv/pdf/mpds018i, DatasheetVersion=SBOS557B, Eco-Plan="Green (RoHS & no Sb/Br)", GBW(Typ)(MHz)=1.2, IIB(Max)(pA)=15, Iq per channel(Max)(mA)=0.145, Mounting Technology="Surface Mount", Number of Channels=1, Offset Drift(Typ)(uV/C)=0.3, PackageDescription="5-Pin Plastic Small Outline, Body 1.6 x 2.9 mm, Pitch 0.95 mm", PackageReference=DBV0005A, PackageVersion="4073253-4/K, 03/2006", Packing="SMALL T&R", PartNumber=OPA170AIDBVT, Slew Rate(Typ)(V/us)=0.4, Sub Family="High Supply Voltage Amplifier (>=30V), Low Power Amp (<=500uA), Low Supply Voltage Amplifier (<=2.7V), Precision Amplifier", Vio (25C)(Max)(mV)=1.8
U5: library part CMP-0187-00272-2, "Single-Ended, Rail-to-Rail Input/Output, Low-Gain Programmable Gain Amplifier, 8-Pin SOIC, Extended Temperature, Tape and Reel", Code_IPC=SOIC127P600-8, Code_JEDEC=MS-012, ComponentLink1Description="Manufacturer URL", ComponentLink1URL=http://www.microchip.com/, ComponentLink2Description=Datasheet, ComponentLink2URL=http://ww1.microchip.com/downloads/en/DeviceDoc/21908a.pdf, ComponentLink3Description="Package Specification", ComponentLink3URL=http://www.microchip.com/stellent/groups/techpub_sg/documents/packagingspec/en012702.pdf, DatasheetVersion="revA, Oct-2004", PackageDescription="8-Lead Plastic Small Outline (SN) - Narrow, 3.90mm Body [SOIC]", PackageReference=SOIC-SN8, PackageVersion="revBB, Aug-2009", RevisionNote="URLs added."
U6: library part CMP-0133-00143-1, "Miniature Single-Cell, Fully Integrated Li-Ion, Li-Polymer Charge Management Controller, 4.2V, 5-Pin SOT-23, Industrial Temperature, Tape and Reel", Code_IPC=SOT23-5, DatasheetVersion="revE, Sep-2008", PackageDescription="5-Lead Plastic Small Outline Transistor (OT) [SOT-23]", PackageReference=SOT-23-OT5, PackageVersion="revBB, Aug-2009"
U7: library part CMP-0069-01749-3, "Low Input Voltage, Step-Up DC-DC, 8-pin MSOP, Pb-Free", Manufacturer="Texas Instruments", PackageTopMarking=ZXTT*S06A, PowerWise=N, Code_JEDEC=MO-187-AA, ComponentLink1Description="Datasheet URL", ComponentLink1URL=http://www.ti.com/general/docs/lit/getliterature.tsp?genericPartNumber=LM2621&fileType=pdf, CompType=Switcher, PackageDescription="MINI SOIC, .118 x .118 x .034in, 8 Lead, .0256in Pitch", PackageReference=DGK0008A, PinCount=8, RoHS=Y
U8: library part CMP-209535-000001-1, "LDO Voltage Regulators 1A, 3.3V", Dropout Voltage=1.1V, Manufacturer="Advanced Monolithic Systems", Max Junction Temp=+125°C, Max Power Dissipation=1.2W, Max Supply Voltage=15V, Nominal Supply Current=5mA, Output Current=1A, Output Voltage=3.3V, Package=AMS1117, Temperature="-40°C to +125°C", Temperature Range Low=-40°C, Automotive=No, Category=IC, ComponentLink2Description=Datasheet, ComponentLink2URL=http://www.advanced-monolithic.com/pdf/ds1117.pdf, Device Class L1="Integrated Circuits (ICs)", Device Class L2="Power Management ICs", Device Class L3="Voltage Regulators - Linear", Height=1.8mm, Ipc Land Pattern Name=SOT229P700X180-4, Lead Free=Yes, Manufacturer Part Number=AMS1117-3.3, Number Of Outputs=1, Octopart=https://octopart.com/ams1117-3.3-advanced+monolithic+systems-25899300, Output Type=Fixed, RoHS=TRUE, Standoff Height=0.64mm, Temperature Range High=+125°C
U9: library part CMP-0474-00885-1, "Overvoltage / Overcurrent Protection Controller, 2.5 to 80 V Vin, 8-pin SOT23 (TS8-8), 0 to 70 degC, Pb-Free, Mini Tape and Reel", Extended Temp="C, I, H", Manufacturer="Linear Technology", Power Good=yes, Active Limiting=no, Circuit Breaker Accuracy(%)=10, Circuit Breakers(#)=1, Circuit Breaker Threshold="50 mV", Code_JEDEC=MO-193, ComponentLink1Description="Manufacturer URL", ComponentLink1URL=http://www.linear.com/, ComponentLink2Description=Datasheet, ComponentLink2URL=http://cds.linear.com/docs/en/datasheet/436112fb.pdf, ComponentLink3Description="Package Specification", ComponentLink3URL=http://cds.linear.com/docs/en/packaging/SOT_8_05-08-1637.pdf, DatasheetVersion="Rev. B", Fast Comparator=no, Fault=no, Foldback=no, Mounting Technology="Surface Mount", PackageDescription="8-Pin Plastic TSOT-23, Body 2.9 x 1.63 mm, Pitch 0.65 mm", PackageReference=TS8-8, PackageVersion="Rev. A, 08/2010", Packing="Mini Tape and Reel", PartNumber=LTC4361CTS8-1#TRMPBF, Reset=no, RoHS=TRUE, Vin Range="2.5 to 80 V"
U10: library part CMP-0003-00386-2, "16-Bit ADC with Integrated Multiplexer, Oscillator, and Reference, -40 to 125 degC, 10-pin SOP (DGS10), Green (RoHS & no Sb/Br)", Analog Voltage AV/DD(Max)(V)=5.5, Analog Voltage AV/DD(Min)(V)=2, Manufacturer="Texas Instruments", # Input Channels=1, Architecture=Delta-Sigma, Code_JEDEC=MO-153, ComponentLink1Description="Manufacturer URL", ComponentLink1URL=http://www.ti.com/, ComponentLink2Description=Datasheet, ComponentLink2URL=http://www.ti.com/general/docs/lit/getliterature.tsp?genericPartNumber=ADS1113&fileType=pdf, ComponentLink3Description="Package Specification", ComponentLink3URL=http://www.ti.com/lit/ml/mpds035b/mpds035b.pdf, DatasheetVersion=SBAS444B, Digital Supply(Max)(V)=5.5, Digital Supply(Min)(V)=2, Eco-Plan="Green (RoHS & no Sb/Br)", INL(Max)(+/-LSB)=1, Interface="Serial I2C", Mounting Technology="Surface Mount", PackageDescription="10-Pin Plastic Small Outline, Body 3 x 3 mm, Pitch 0.5 mm", PackageReference=DGS10, PackageVersion="4073272/C, 02/2004", PartNumber=ADS1113IDGST, Resolution(Bits)=16, Sample Rate (max)(SPS)=860, SubFamily="Precision ADC (<=10MSPS)"

## Free pads (board coordinates)
  round 173.2 hole 86.6: 13(100,100) 13(100,1900) 13(1900,100) 13(1900,1900)

## Via types
v1: diameter 20, hole 10, Top Layer to Bottom Layer, 145 vias
v2: diameter 30, hole 15, Top Layer to Bottom Layer, 24 vias
v3: diameter 39.37, hole 19.68, Top Layer to Bottom Layer, 12 vias
v4: diameter 50, hole 28, Top Layer to Bottom Layer, 12 vias

## Nets (pads, with @x,y where several pads share a name; then routed paths per layer and width w, separated by ;. In a path a pad name is that pad's centre, name@x,y a point inside that pad or via, vN(x,y) a via of type N, cw(c..) or ccw(c..) an arc to the next point about the centre after c; other vN are vias at no path point)
+3.3VA: C19.2 C20.2 FB2.2 U1.13 | length 140.5
  Top Layer w10: C20.2 726.07,911.07 771.31,911.07 U1.13
  Top Layer w20: C19.2@680,898 680.83,897.17 701.83,897.17 701.94,897.29 C20.2@712.29,897.29 ; FB2.2 712.29,855.71 C20.2@712.29,897.29 ; C20.2 C20.2@712.29,897.29
+3V3: C6.2 C15.2 C21.2 C22.2 C23.2 C24.2 C25.2 C26.2 C27.2 C28.2 C29.2 C30.2 C31.2 C32.2 C33.2 FB2.1 P2.1 P4.1 R9.2 R10.2 R11.2 R12.2 U1.1 U1.19 U1.32 U1.48 U1.64 U2.1 U3.1 U4.5 U5.8 U8.2 U8.4 U10.8 | length 2956.8
  Top Layer w3.5: C23.2 C23.2@886,675
  Top Layer w10: C33.2 530.83,212.83 542.71,212.83 548.7,218.82 559.82,218.82 567,226 593.88,226 609.92,209.96 609.92,177.35 U10.8 ; C21.2 765,1155 771.65,1148.35 U1.1 ; R12.2@839,486 841,486 R12.2 ; C28.2@839,1286 852.02,1272.98 852.02,1239.51 852.36,1239.16 U1.64 ; C22.2 891.39,713.39 891.39,771.31 U1.19 ; v2(914,575) 914,568 913,567 913,539.37 U2.1 ; U1.32 1147.64,760.84 1148.47,760 1148.23,759.76 1148.23,745.47 1155.5,738.2 1183.2,738.2 C24.2 ; U1.48 1228.35,1148.35 1230,1150 C26.2 ; C31.2@1244,581 C31.2@1244,585 ; v2(1531,607) 1531,649 1530,650 1537,657 1574,657 1574.63,657.63 U3.1
  Top Layer w15: R10.2 756.69,251.69 755,250 755,219.87 R9.2 757,218.48 783.48,218.48 v2(810,245) ; v2(811.61,630) 811.72,630.11 849.11,630.11 C23.2
  Top Layer w20: U8.2@299,1312.21 319.17,1332.38 C15.2@319.17,1351.17 ; v2(480,207) C33.2 ; U5.8 566,736 C30.2 583,826.88 604,847.88 v4(604,856) 608,856 610,854 611.5,855.5 657.93,855.5 FB2.1 ; v2(724,1226) 724.17,1226.17 764.17,1226.17 C21.2 ; v4(759,1375) 764.74,1369.26 811.74,1369.26 838,1343 C29.2 839,1319 C28.2@839,1286 ; v2(788.42,538.58) 806.17,520.83 841.17,520.83 842,520 841.17,519.17 841.17,488.17 R12.2@839,486 ; C23.2@885.17,674.17 886,675 C22.2 ; U4.5 1105.02,278.57 1133.43,278.57 C6.2@1134.43,277.57 ; v2(1135,329) 1135,295 1127,287 1134.43,279.57 C6.2@1134.43,277.57 ; C6.2@1144.5,267.5 C6.2@1134.43,277.57 ; C24.2 1218,741 1242,765 v2(1242,774) ; C26.2 1262,1188 1262.18,1188.18 1285.18,1188.18 v2(1317,1220) ; v2(1541,1735) C32.2 1541.83,1680.83 1641.83,1680.83 1643,1682 P4.1@1646.88,1682
  Top Layer w25: v4(1243,629) 1244,628 C31.2@1244,585
  Top Layer w50: v4(187,1048) 264.87,1048 225,1087.87 v4(225,1131) ; v4(225,1223) 299,1297 U8.4 ; v4(296,954) U8.4@296,1043.28 ; U8.2@299,1303 v4@379,1223 ; U8.2 U8.2@299,1312.21 ; U8.4@299.28,1046 v4(410,1046) ; U8.4@331.41,1046.28 373,1087.87 v4(373,1131)
  other v4: 380,1223
+5V: C10.2 C12.1 D2.1 FB1.1 R14.2 R17.1 U7.7 | length 577.8
  Top Layer w15: R14.2 288,1404 v3(336,1404) ; U7.7 537.8,1528.8 538,1529 R17.1 ; C10.2 695.8,1528.8 v3(698,1531)
  Bottom Layer w15: v3(336,1404) 463,1531 v3(698,1531)
+5V_USB: C9.2 D4.5 J1.1 R13.2 U6.4 | length 1390.1
  Top Layer w15: U6.4@1365,1521 U6.4@1365.4,1520.6 ; U6.4 U6.4@1365.4,1520.6 ; R13.2 1470,1683 v3(1493,1683) ; v3(1439,1444) C9.2 ; v3(1492,1549) 1492,1542.65 1457.83,1508.48 1457.63,1508.67 1442.33,1508.67 C9.2 ; v3(1530,1289) 1572,1247 1787.04,1247 1821.74,1212.3 1821.74,1057.71 1808.85,1044.82 1796.78,1044.82 1796.4,1044.45 J1.1 1777.33,1044.07 1750.6,1044.07 1721.81,1015.29 1654.71,1015.29 1645.63,1024.37 1645.63,1071.21 1654.41,1080 D4.5 ; U6.4@1365.4,1520.6 1370.67,1515.33 1435.67,1515.33 C9.2
  Bottom Layer w15: v3(1439,1444) 1439,1380 v3(1530,1289) ; v3(1492,1549) 1493,1550 v3(1493,1683)
+LED_IR: P1.1 U3.9 | length 982.1
  Top Layer w10: v2(1321,678) 1321.61,677.39 1415.2,677.39 U3.9
  Bottom Layer w10: v2(1321,678) 1344,701 1728.75,701 1728.75,433.07 P1.1@1871.81,290
+LED_R: P7.1 U3.3 | length 663.2
  Top Layer w10: v2(1491,736) 1497,736 1535.92,697.08 1559.92,697.08 1560,697 U3.3 U3.3@1574.65,696.92
  Bottom Layer w10: v2(1491,736) 1760,736 1760,575 1807.99,527.01 P7.1@1873.37,527.01
BAT+: P5.1 R21.1 U6.3 U9.5 | length 393
  Top Layer w15: U9.5 939.61,1503.61 940,1504 990.06,1504 R21.1@1036.11,1457.94 ; R21.1 R21.1@1036.11,1457.94 ; U6.3@1273,1520.35 U6.3 1260.94,1520.6 1229.35,1489 P5.1 1127.47,1451.47 1042.58,1451.47 R21.1@1036.11,1457.94
BOOT0: R18.2 U1.60 | length 60.2
  Top Layer w10: R18.2@925,1286 930.76,1280.24 930.76,1228.69 U1.60
BOOT1: R19.2 U1.28 | length 69.4
  Top Layer w10: R19.2 1055,716 1068.55,729.55 1068.55,771.31 U1.28
DAC_D: C1.2 U2.6 | length 292.6
  Top Layer w10: U2.6@1135.37,460.63 U2.6 1115.06,460.98 1143.98,460.98 1197,407.95 1197,314 1235,276 C1.2
DAC_IR: C4.2 R6.2 R7.2 U2.9 | length 359.4
  Top Layer w10: U2.9 1196.14,519.69 C4.2 1278.65,437.17 1385.17,437.17 1400.69,452.69 R7.2@1401.04,452.35
  Top Layer w20: R7.2@1400.69,452.69 R6.2
DAC_OFFSET: C2.2 U2.7 U5.3 | length 777.4
  Top Layer w10: U5.3 666,495.01 693.99,523 753.79,523 839.79,437 1032.72,437 1076.03,480.32 U2.7 1115.06,479.97 1150.03,479.97 1151.02,478.98 1151.43,478.98 1215,415.41 1215,357 1229,343 1252.83,343 C2.2
DAC_RED: C3.2 R3.2 R4.2 U2.8 | length 615.2
  Top Layer w10: U2.8 1161.24,500 1234.86,426.39 1234.86,417.97 C3.2 1279.83,373 1554,373 1579,398 R4.2@1579,448
  Top Layer w20: R4.2@1579,448 R3.2
GND: C1.1 C2.1 C3.1 C4.1 C6.1 C7.1 C8.1 C9.1 C10.1 C11.1 C13.1 C14.1 C15.1 C16.1 C17.1 C18.1 C19.1 C20.1 C21.1 C22.1 C23.1 C24.1 C25.1 C26.1 C27.1 C28.1 C29.1 C30.1 C31.1 C32.1 C33.1 D4.2 HSE1.2 HSE1.4 J1.5 P1.2 P2.2 P4.3 P4.5 P4.9 P5.2 P6.2 P7.2 pad.13 R1.1 R4.1 R5.1 R7.1 R8.1 R15.2 R16.2 R18.1 R19.1 R23.2 U1.12 U1.18 U1.63 U2.4 U2.10 U3.2 U3.6 U3.10 U4.2 U4.3 U5.4 U6.2 U7.1 U7.5 U8.1 U9.1 U9.4 U10.1 U10.3 | length 1589
  Top Layer w10: C20.1 725.55,931.45 755.49,931.45 755.84,931.1 U1.12 ; U1.18@871.7,750.49 U1.18@872.05,750.84 ; U2.4 1004.47,480.32 1063.53,539.37 U2.10 ; v2(1391.03,621.67) 1391.03,640.58 1408.08,657.63 U3.10 ; v3(1393,793) 1387.38,787.38 1387.38,759.43 1383.15,755.2 1383.15,743.06 1389.84,736.37 U3.6 ; v2(1499,668) 1508,677 1567,677 1567,677.24 1567.08,677.31 U3.2
  Top Layer w15: R15.2 309.39,1532 330.55,1553.15 361.17,1553.15 U7.1 ; v4(513,947) 524,958 557,958 560,961 550,971 550,1010 550.5,1010.5 HSE1.2 ; U7.5 542.47,1477.61 543.83,1476.26 C13.1 ; C17.1@605,1180 C17.1 ; HSE1.4 613.5,1171.5 611.33,1173.67 611.33,1176.67 C17.1 ; v4(655,1210) 648.3,1203.3 631.3,1203.3 C17.1 ; v3(1030,620) 1034.66,624.66 1034.66,641.66 1052,659 1052,662 R19.1 ; U6.2 C9.1 ; D4.2 1598.51,1084.31 1625.31,1084.31 1639,1098 1639,1129.01 1656.8,1146.81 ; v3(1640,1189) 1640,1172.17 1656.8,1155.36 1656.8,1146.81 ; J1.5 1656.8,1146.81
  Int1 w15: v4(513,947) 513,897 515,895
  Bottom Layer w10: v2(1391.03,621.67) 1443.67,621.67 1490,668 v2(1499,668)
  other v1: 300,100 400,100 500,100 600,100 700,100 800,100 900,100 1000,100 1400,100 1500,100 1600,100 1700,100 150,200 250,200 350,200 950,200 1050,200 1250,200 1350,200 1450,200 1550,200 1650,200 1750,200 1850,200 1950,200 300,300 400,300 500,300 700,300 900,300 1400,300 1500,300 1600,300 1800,300 250,400 350,400 450,400 750,400 850,400 950,400 1150,400 1350,400 1450,400 1650,400 1950,400 300,500 400,500 500,500 1300,500 1800,500 250,600 350,600 450,600 1350,600 1950,600 200,700 300,700 400,700 500,700 800,700 250,800 350,800 450,800 550,800 650,800 750,800 1450,800 1550,800 1650,800 1950,800 100,900 200,900 300,900 400,900 500,900 600,900 900,900 1100,900 1500,900 1800,900 150,1000 250,1000 350,1000 450,1000 1050,1000 1150,1000 1350,1000 1550,1000 1950,1000 100,1100 900,1100 1100,1100 150,1200 450,1200 1350,1200 1450,1200 1950,1200 100,1300 500,1300 600,1300 700,1300 900,1300 1000,1300 1200,1300 1300,1300 1600,1300 1800,1300 450,1400 650,1400 850,1400 950,1400 1050,1400 1950,1400 100,1500 200,1500 1500,1500 150,1600 650,1600 750,1600 1450,1600 1950,1600 100,1700 900,1700 1000,1700 1100,1700 1900,1700 150,1800 250,1800 350,1800 450,1800 550,1800 650,1800 750,1800 850,1800 1450,1800 1850,1800 1950,1800 300,1900 400,1900 500,1900 600,1900 700,1900 800,1900 1200,1900 1500,1900
I2C1_SCL: R9.1 U1.58 U10.10 | length 1350.1
  Top Layer w10: U10.10 649.37,200.74 666.8,218.17 R9.1 715,213.87 715,205 742.67,177.33 v2(810.97,177.33) ; U1.58 970.47,1181.53 993,1159 v2(993,1151)
  Bottom Layer w10: v2(810.97,177.33) 993,359.36 v2(993,1151)
I2C1_SDA: R10.1 U1.59 U10.9 | length 1277.5
  Top Layer w10: U10.9 629.69,182.92 629.76,183 629.76,214.76 670.17,255.17 R10.1 760.52,305 v2(810,305) ; v2(940,1150) 943.83,1153.83 943.83,1174.89 950.79,1181.85 U1.59 U1.59@950.79,1254.43
  Bottom Layer w10: v2(810,305) 957.69,452.69 957.69,873.54 940,891.22 v2(940,1150)
I2C2_SCL: R11.1 U1.29 U2.2 | length 396.1
  Top Layer w10: R11.1@888,520 888.16,519.84 953.13,519.84 U2.2 991.97,519.69 1088.58,616.3 U1.29
I2C2_SDA: R12.1 U1.30 U2.3 | length 433.8
  Top Layer w3.5: U1.30@1108,772 U1.30 U1.30
  Top Layer w10: R12.1 903,500 U2.3 997.74,500 1108.27,610.53 U1.30
NetC7_2: C7.2 U1.31 | length 106.3
  Top Layer w10: U1.31@1127.95,772.95 U1.31 1128.3,771.31 1128.3,725.7 1146,708 C7.2
NetC8_2: C8.2 U1.47 | length 69.3
  Top Layer w10: U1.47 1274.95,1127.95 C8.2
NetC12_2: C12.2 R14.1 R15.1 U7.4 | length 219.1
  Top Layer w15: R14.1 C12.2 239.5,1448.5 239.5,1485.5 R15.1 304.51,1486 314.26,1476.26 364.41,1476.26 365.77,1477.61 U7.4
NetC13_2: C13.2 R17.2 R20.1 U7.2 U7.6 | length 429
  Top Layer w15: U7.2 363.63,1527.56 401.19,1527.56 427.48,1501.28 ; R20.1 427.48,1444.48 427.48,1501.28 ; C13.2 590.41,1429.59 590.41,1482.41 R17.2 572.03,1501.97 538.83,1501.97 U7.6 429.4,1503.2 427.48,1501.28
NetC14_2: C14.2 FB1.2 U8.3 | length 108.7
  Top Layer w15: FB1.2 146.57,1334.43 148,1333 145,1330 145,1298 C14.2 197.49,1297 206.21,1305.72 U8.3
NetC18_2: C18.2 HSE1.3 R22.1 | length 119.6
  Top Layer w15: C18.2 612,1014.2 HSE1.3 ; HSE1.3@615,1014.19 HSE1.3 ; R22.1 628,1028 615,1015 614.31,1015.69 HSE1.3
NetD1_1: D1.1 R1.2 | length 60.1
  Top Layer w15: D1.1 1436.78,1938.75 1436.78,1928.22 1444.67,1920.33 1444.67,1898.33 R1.2
NetD1_2: D1.2 U1.33 | length 1681
  Top Layer w10: U1.33 1228.64,852.36 1229,852 1229.36,852.36 1295.64,852.36 v2(1308,840)
  Top Layer w15: v2(1359,1890) 1361.87,1892.87 1361.87,1940.87 1368,1947 D1.2
  Bottom Layer w10: v2(1308,840) 1576.41,1108.41 1576.41,1171.64 1841,1436.22 1841,1516 1467,1890 v2(1359,1890)
NetD2_2: D2.2 L1.1 U7.8
NetD3_1: D3.1 R23.1 | length 166.5
  Top Layer w15: R23.1 1221.33,1749.33 1221.33,1769.33 1235.5,1783.5 1319.5,1783.5 1335.25,1767.75 D3.1
NetDS1_1: DS1.1 R13.1 | length 71.1
  Top Layer w15: DS1.1 1338.75,1684.25 1340,1683 1340,1689 1343.5,1692.5 1359.5,1692.5 R13.1
NetQ1_1: Q1.1 R3.1 | length 62.8
  Top Layer w25: Q1.1 1594.2,526.8 1625,496 R3.1
NetQ1_2: Q1.2 R5.2 | length 45
  Top Layer w25: R5.2 Q1.2
NetQ1_3: Q1.3 U3.5 | length 171.4
  Top Layer w10: U3.5 1574.8,736.29 1610.71,736.29 1620.85,726.15 1620.85,620.15 1631.26,609.74 Q1.3
NetQ2_1: Q2.1 R6.1 | length 68.1
  Top Layer w10: Q2.1 1412.72,527.28 Q2.1@1414,526
  Top Layer w25: Q2.1@1414,526 1431,526 1446.69,510.31 R6.1
NetQ2_2: Q2.2 R8.2 | length 43.1
  Top Layer w25: R8.2@1484.69,487 1483,487 1483,524.54 Q2.2
NetQ2_3: Q2.3 U3.7 | length 163.7
  Top Layer w10: U3.7 1415.35,716.61 1446.42,716.61 1448.1,714.92 1448.29,714.92 1464,699.21 1464,607.89 1450.21,607.89 Q2.3
NetQ3_3: Q3.3 U9.7 | length 97.9
  Top Layer w15: U9.7 950.63,1554.8 951,1555.17 966.17,1555.17 977.09,1566.09 977.09,1618.21 Q3.3
NetR16_1: R16.1 U6.5 | length 54.5
  Top Layer w15: U6.5 1368,1596.16 1368,1634 R16.1
NetR20_2: R20.2 U7.3 | length 113.5
  Top Layer w15: U7.3 363.63,1501.97 394.26,1501.97 404.48,1491.75 404.48,1463.48 394.26,1453.26 390.26,1453.26 380,1443 380,1440 379,1441 R20.2
NRST: P4.10 U1.7 | length 1338.5
  Top Layer w10: U1.7 856.53,1029.53 v2(857,1030) ; v2(1783,1429) 1783,1472.43 1792.57,1482 P4.10@1807.12,1482
  Bottom Layer w10: v2(857,1030) 857,1128 908,1179 1129.43,1179 1151.11,1157.31 1536.64,1157.31 1657.9,1278.58 1657.9,1303.9 v2(1783,1429)
OC_IR: U1.37 U3.8 | length 368.5
  Top Layer w10: U1.37 1282.9,931.1 1354,860 1354,715.74 1372.74,697 1415.12,697 1415.2,697.08 U3.8
OC_RED: U1.41 U3.4 | length 486.1
  Top Layer w10: U1.41@1226.16,1009.84 U1.41 1276.16,1009.84 1526.51,759.49 1526.51,731.95 1541.77,716.68 U3.4
PD_SIG: C5.2 P6.1 R2.2 U4.4 | length 379.7